# Altium PCB PCB_PDB_V2.PcbDoc (part 1 of 2)
Units mm, origin at the board's own origin, x right, y up, seen from the top; angles counter-clockwise.
Board outline 70 x 60 mm, 4 copper layers (Top Layer, Int1, Int2, Bottom Layer), stack 1.649 mm thick; 78 components, 35 nets, 226 pads, 126 vias.
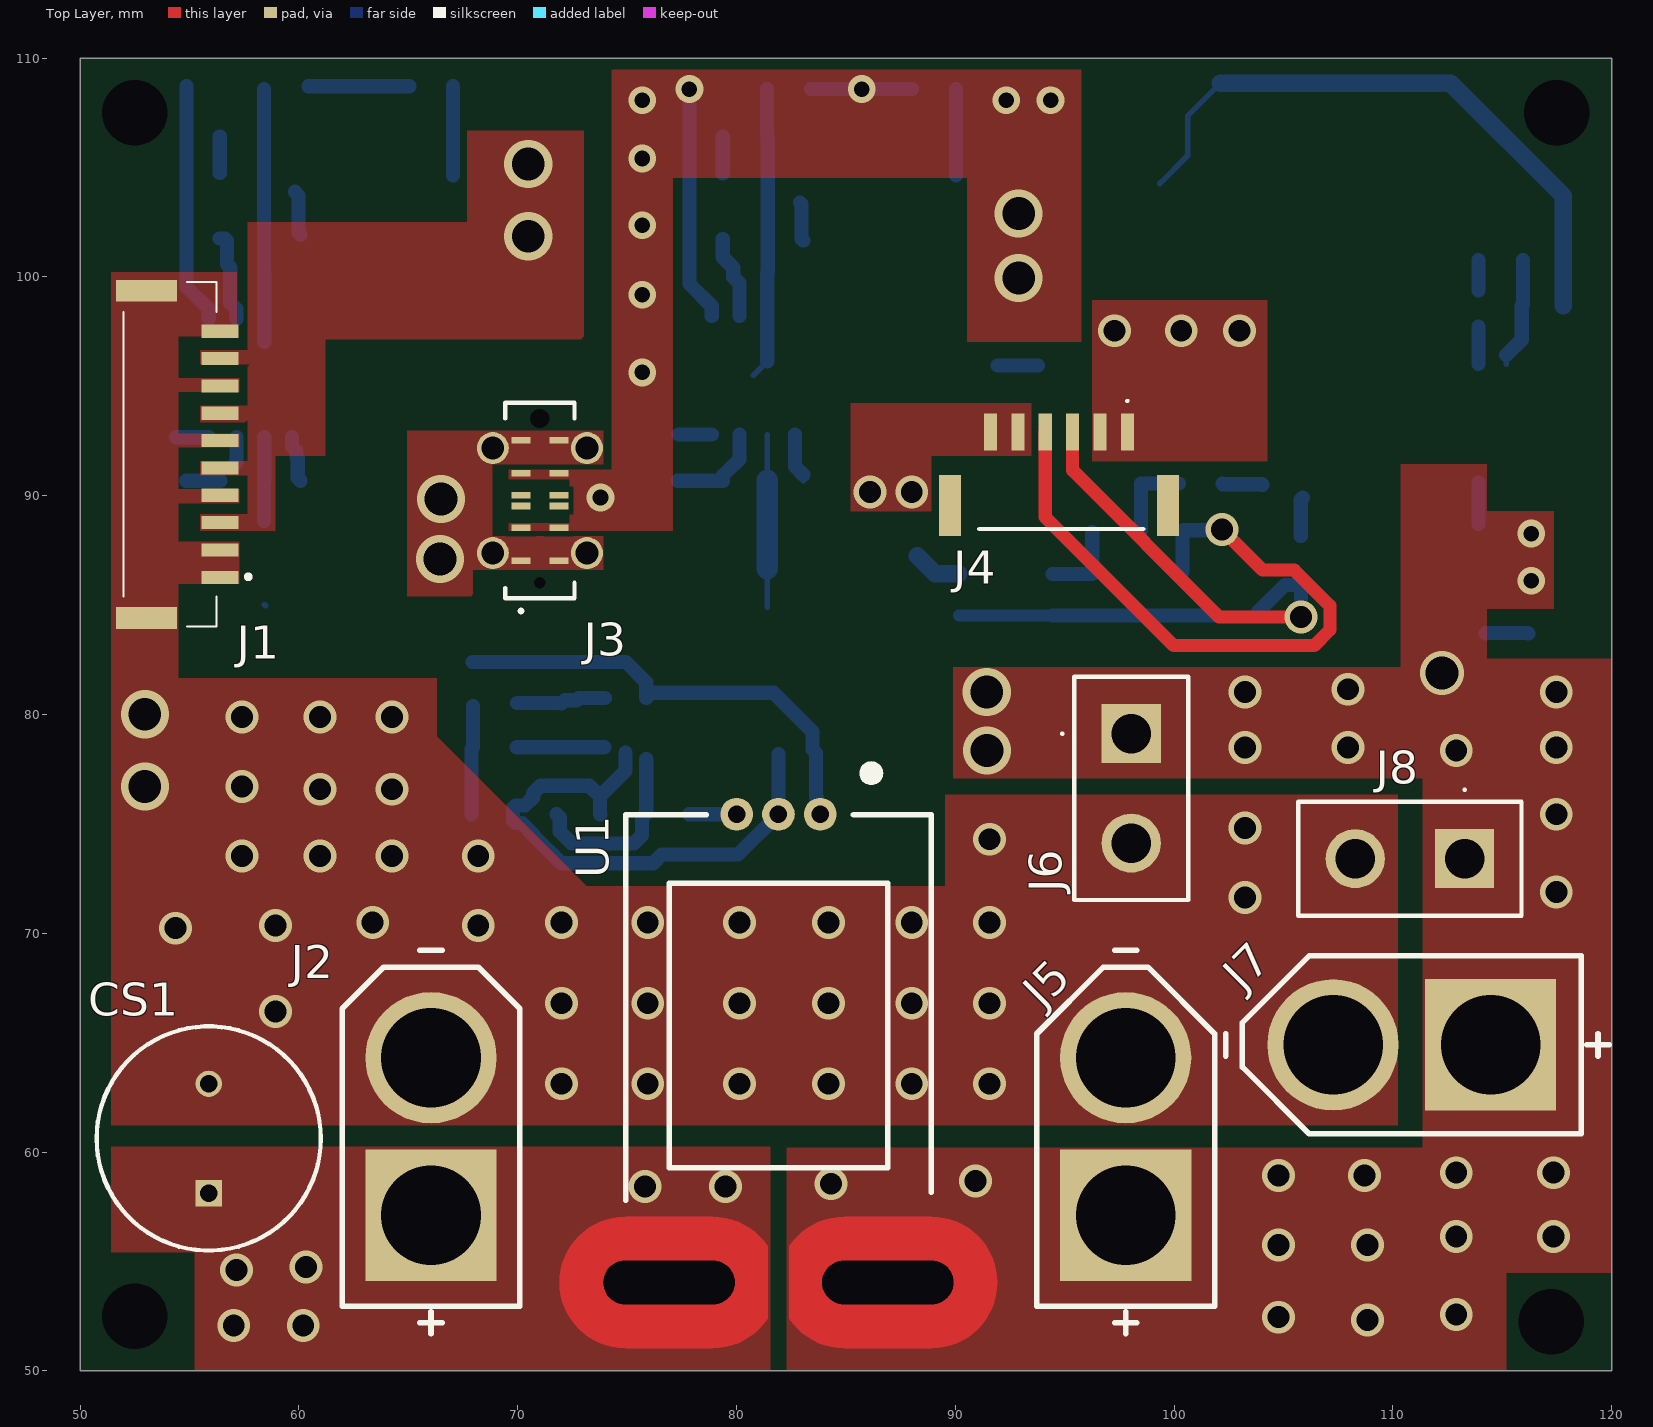
[diagram p0: Top Layer view]
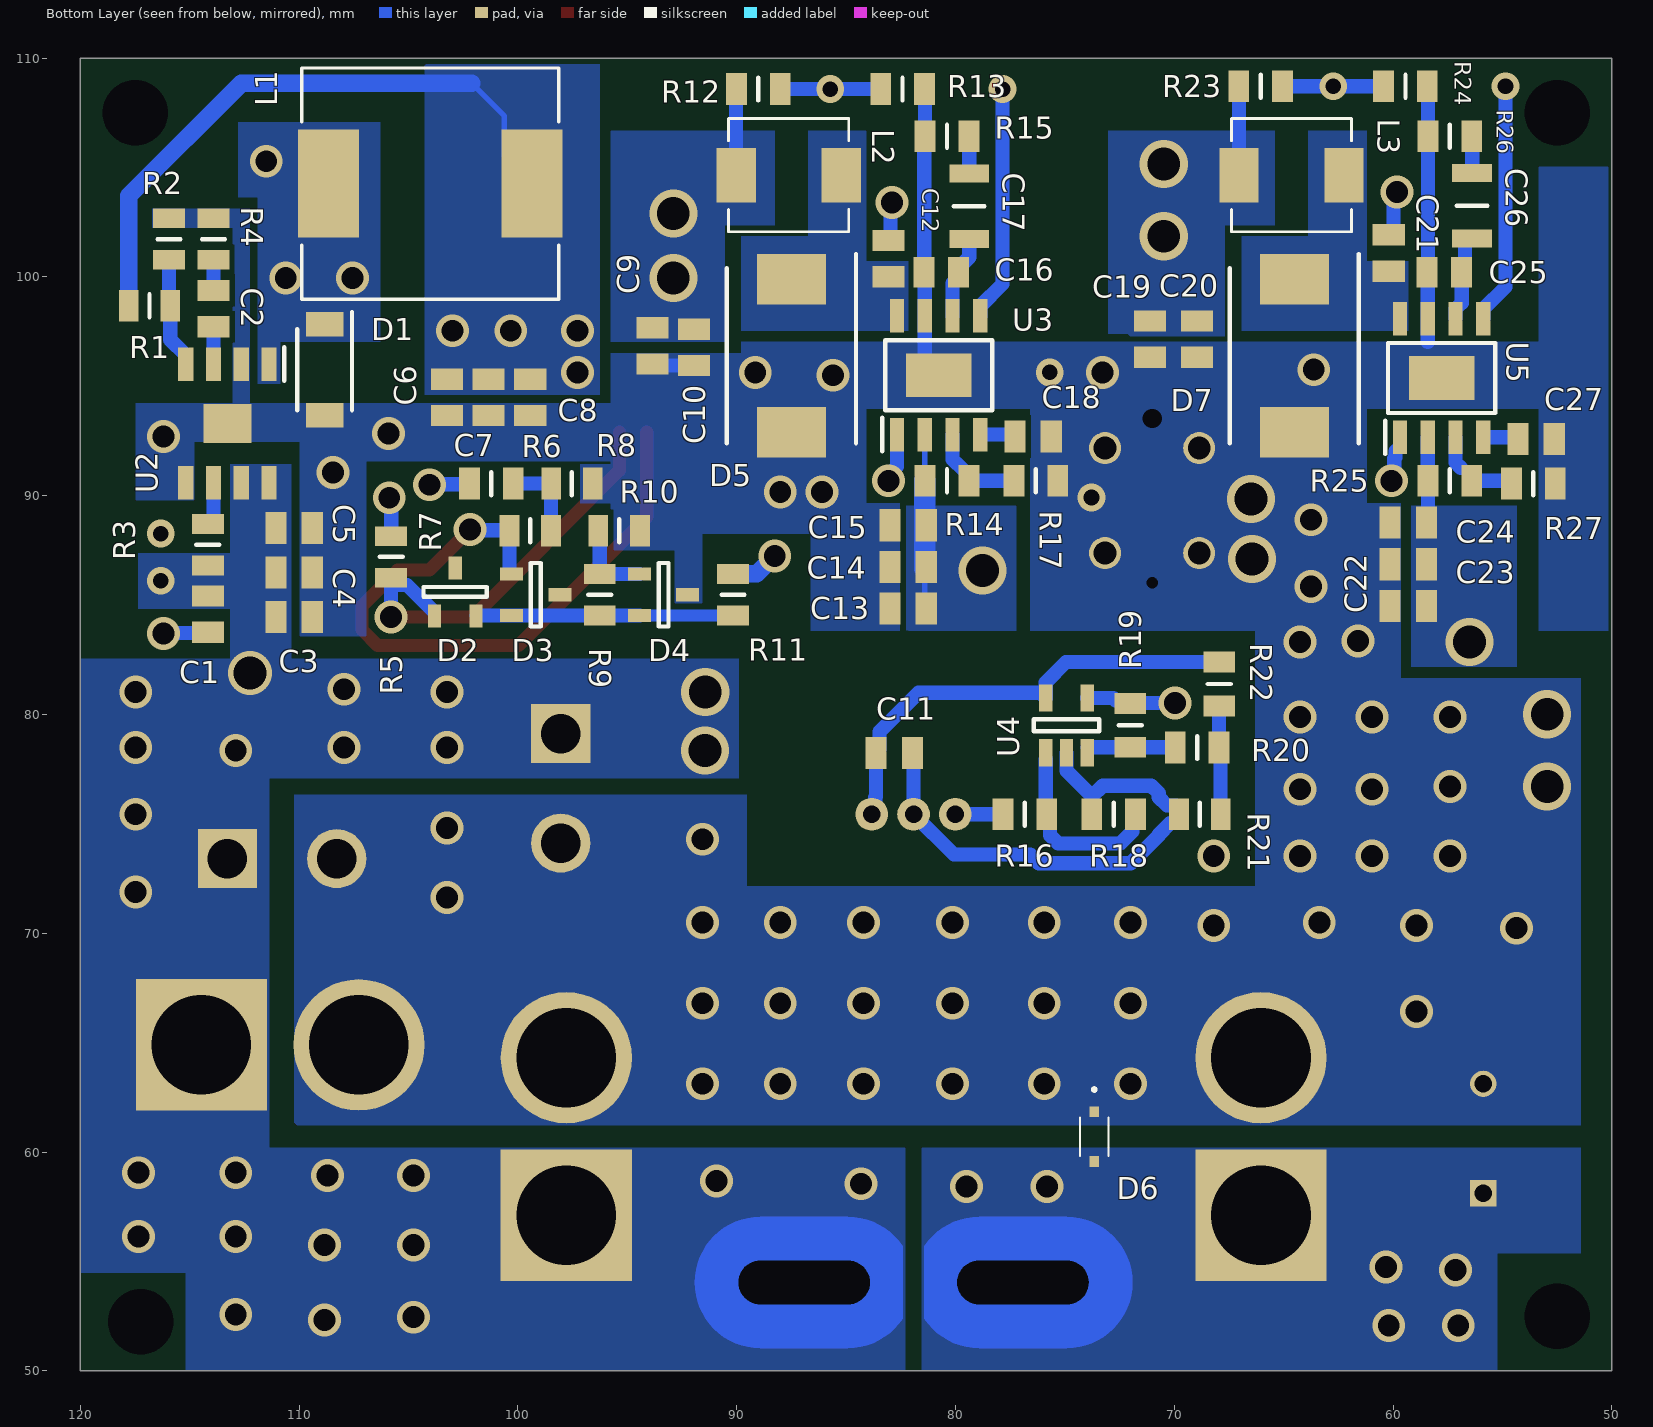
[diagram p1: Bottom Layer view, seen from below]
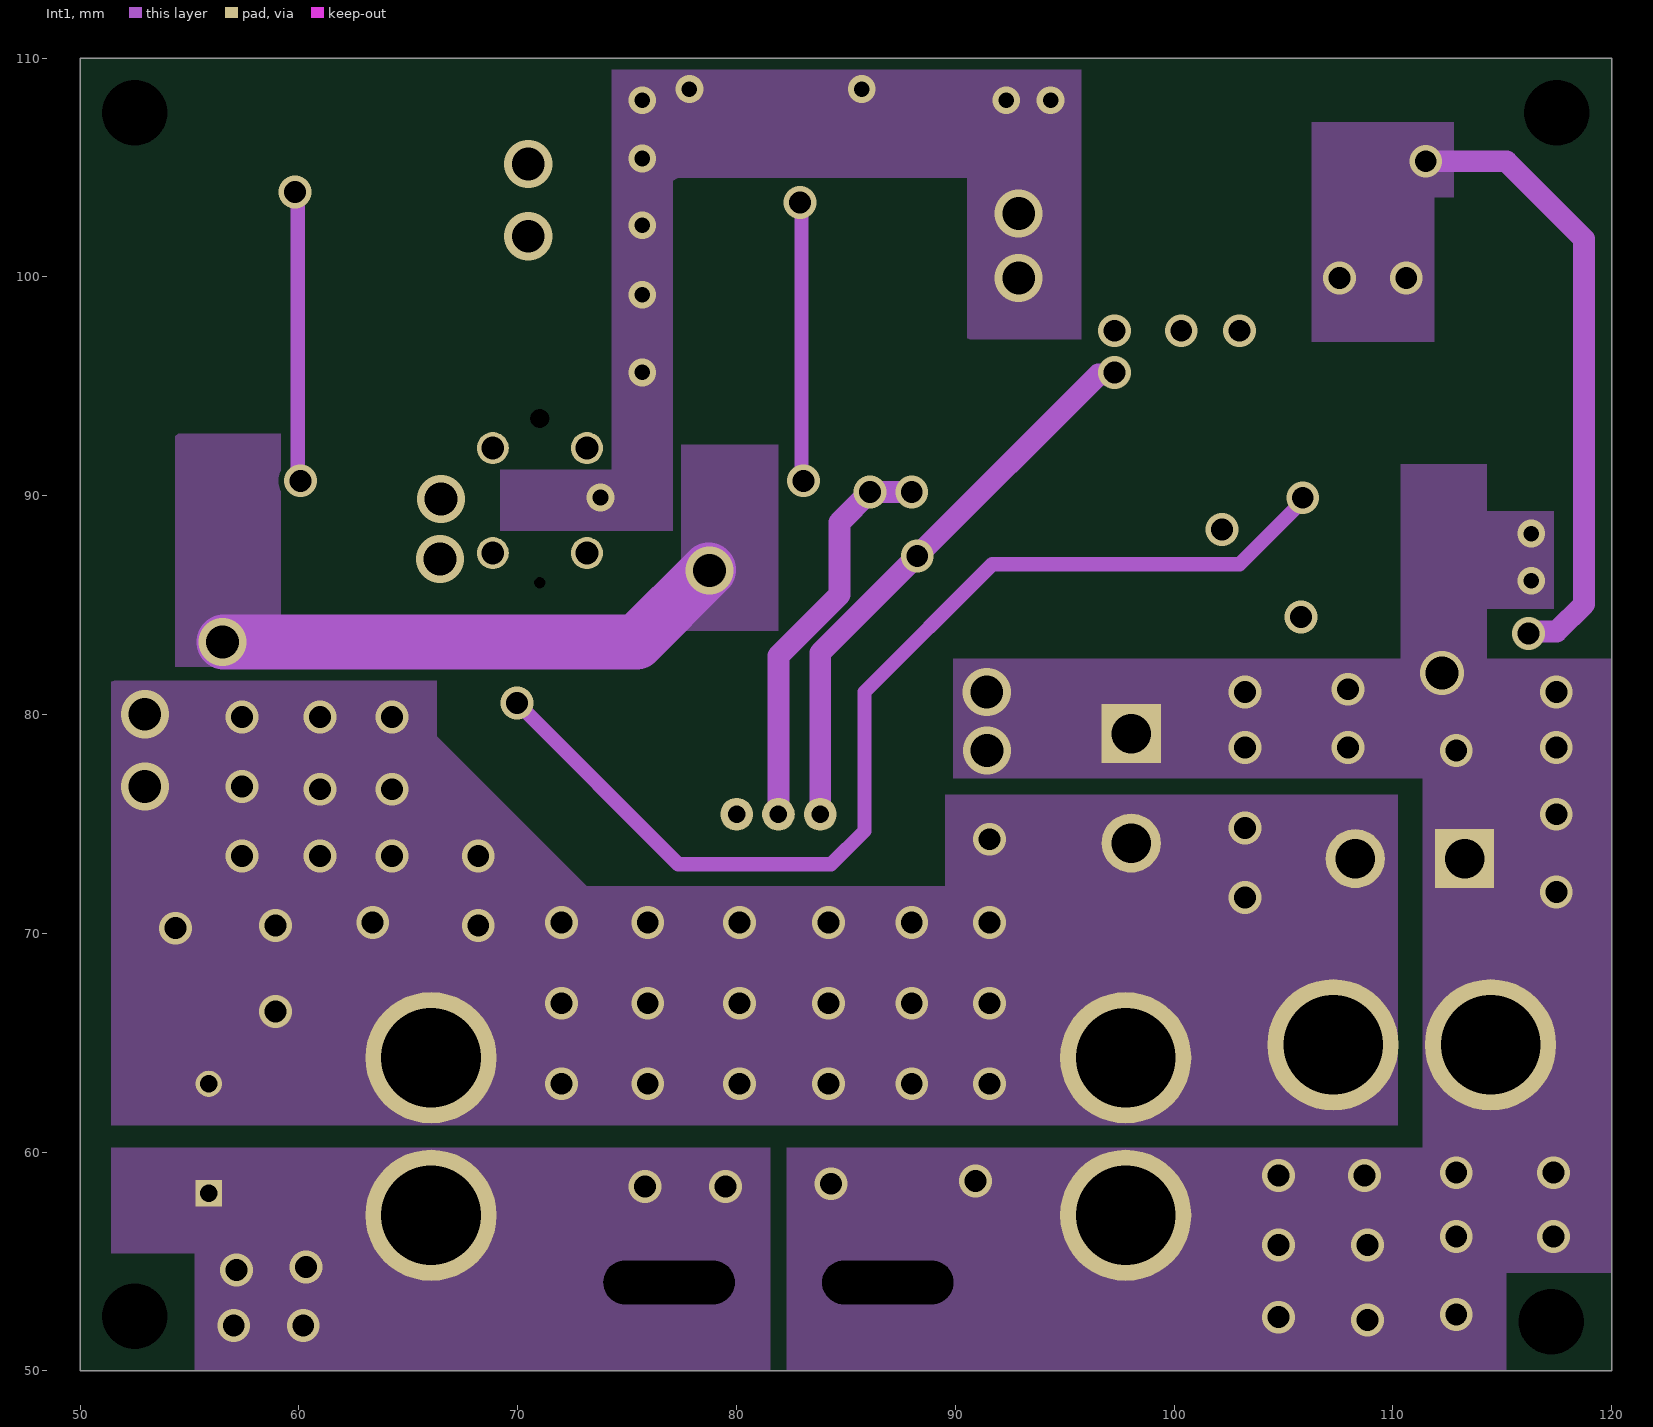
[diagram p2: Int1]
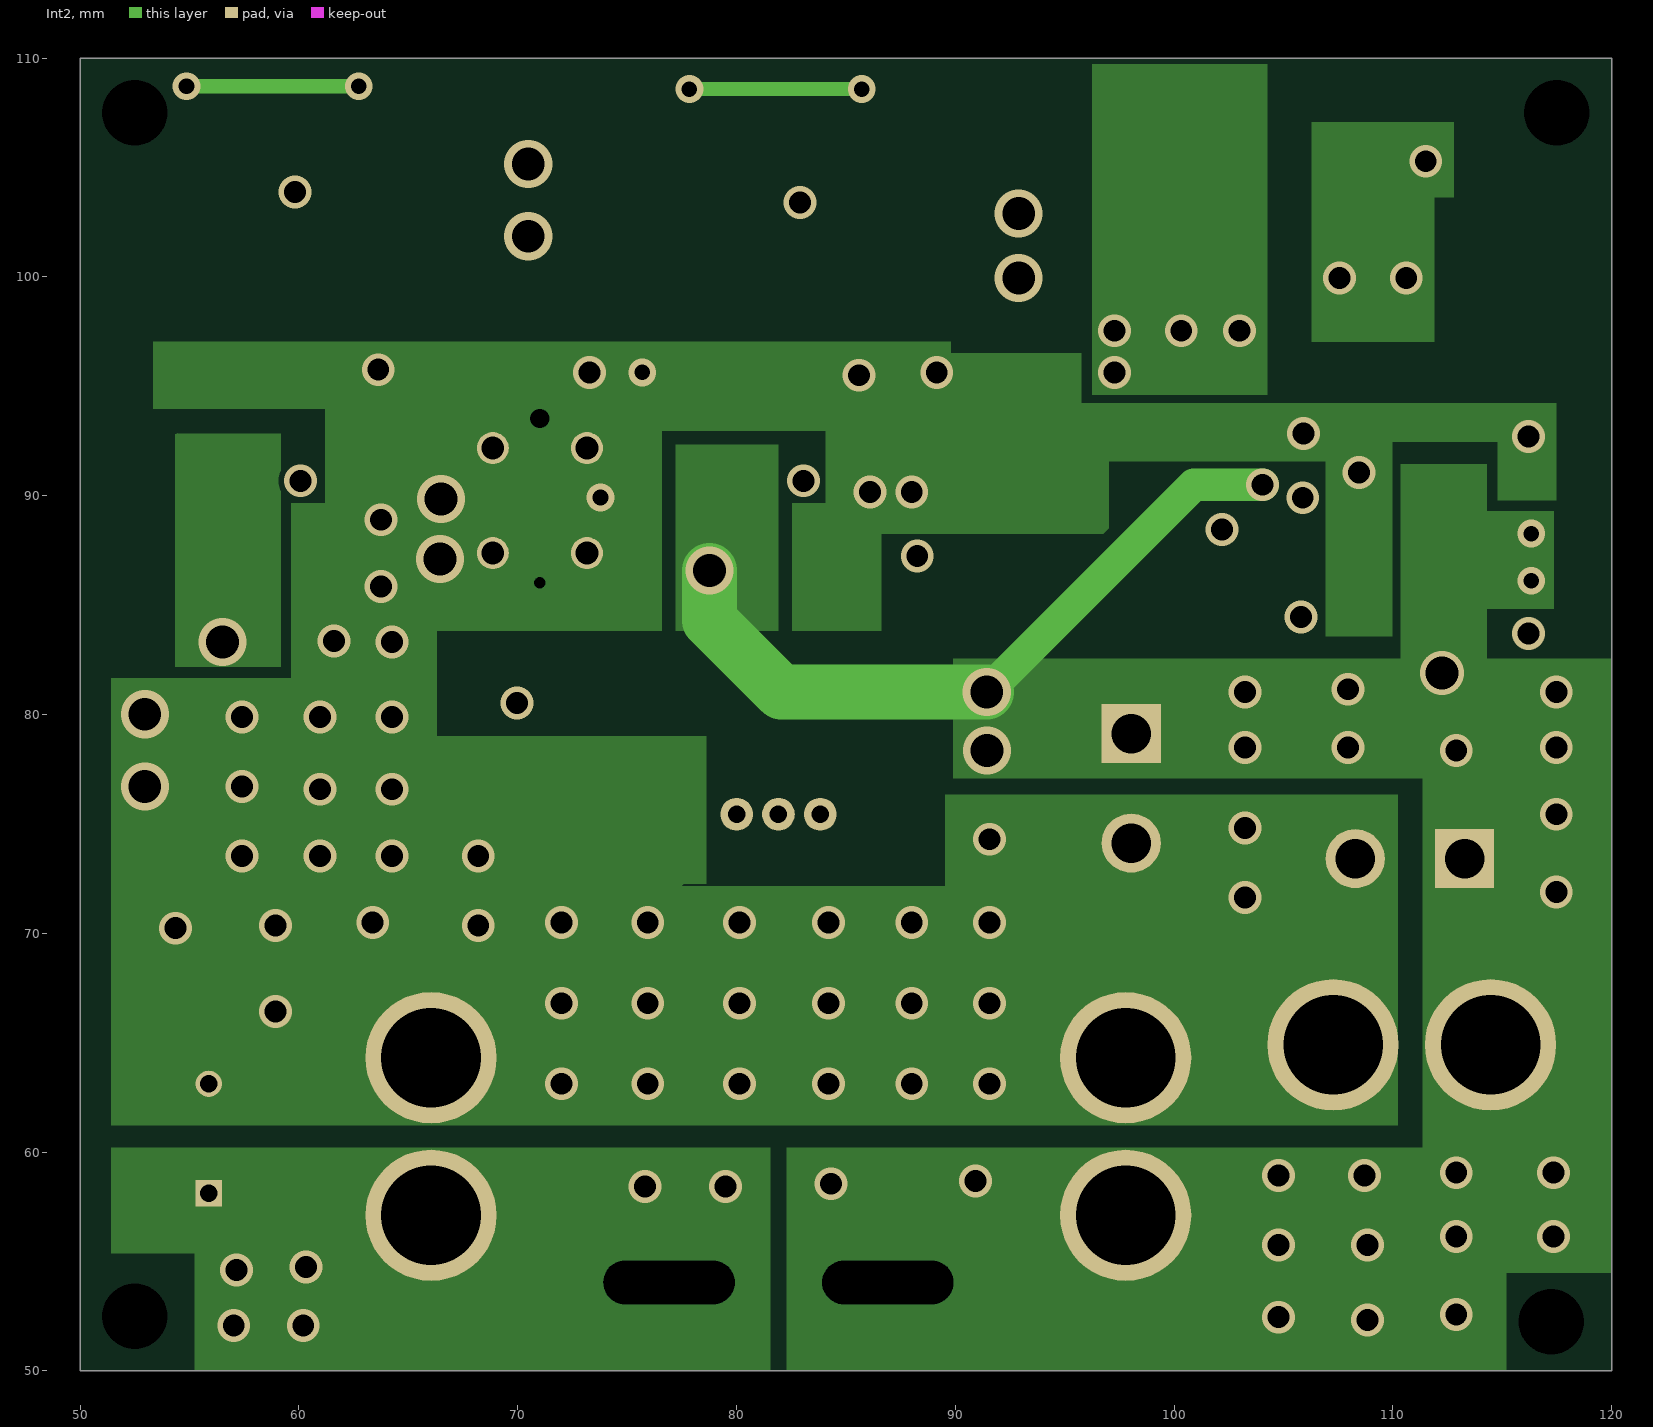
[diagram p3: Int2]
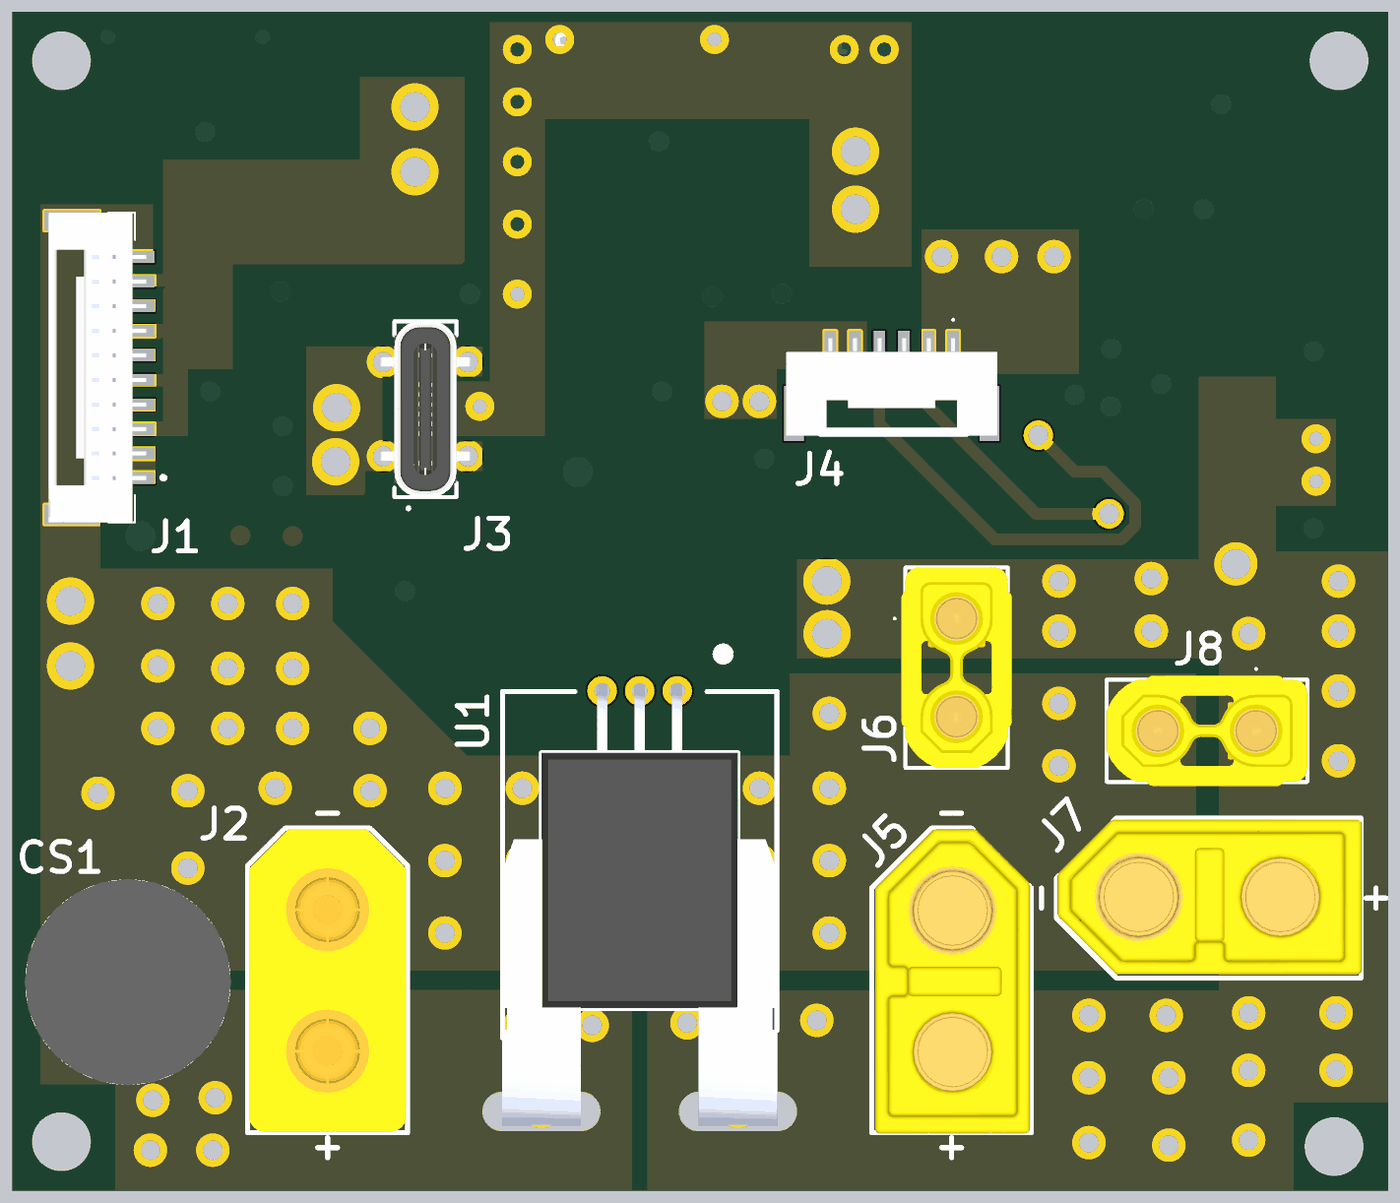
[diagram p4: 3D render of the assembled board from above, using the file's embedded part models]
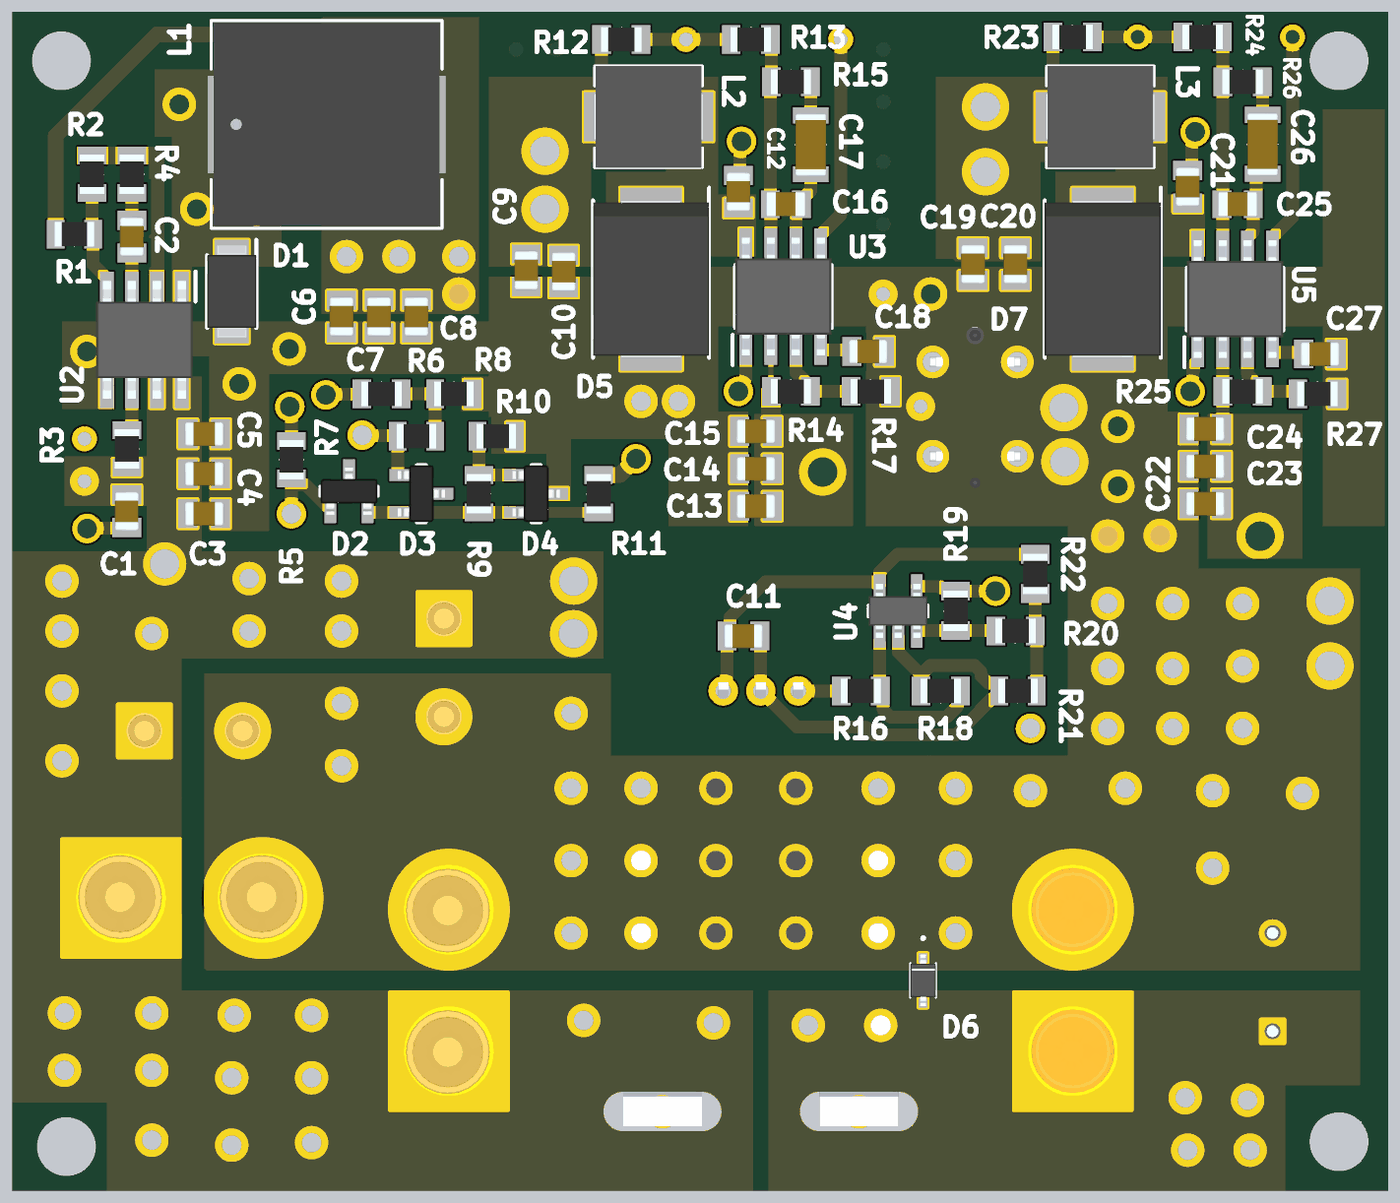
[diagram p5: 3D render of the assembled board from below, using the file's embedded part models]

## Layer stack, top to bottom
Top Solder: solder mask 0.0254, SM-001, Dk 4
Top Layer: signal copper 0.105
Dielectric 1: prepreg 0.1295, PP-017, Dk 4.3
Dielectric 2: prepreg 0.1295, PP-017, Dk 4.3
Int1: signal copper 0.105
Dielectric 3: core 0.7112, Core-039, Dk 4.8
Int2: signal copper 0.105
Dielectric 4: prepreg 0.1295, PP-017, Dk 4.3
Dielectric 5: prepreg 0.1295, PP-017, Dk 4.3
Bottom Layer: signal copper 0.105
Bottom Solder: solder mask 0.0254, SM-001, Dk 4

## Board outline
50,50 50,110 120,110 120,50

## Design rules (kind name [scope] priority, off if disabled: settings)
Clearance [All] p1: gap=0.254 ignorepadtopadclearanceinfootprint=FALSE
MinimumSolderMaskSliver [All] p1: minsoldermaskwidth=0.2
PolygonConnect [All] p1: connectstyle=Direct reliefconductorwidth=0.65 reliefentries=4 polygonreliefangle="90 Angle" airgapwidth=0.254
RoutingVias [All] p1: holewidth=0.711 width=1.27 viastyle="Through Hole" minholewidth=0.711 minwidth=1.27 maxholewidth=0.711 maxwidth=1.27
SilkToSilkClearance [All] p1: silktosilkclearance=0.2
SilkToSolderMaskClearance [IsPad] p1: minsilkscreentomaskgap=0.2 clearancetoexposedcopper=TRUE
SolderMaskExpansion [All] p1: expansion=0.102 istentingtop=FALSE
SupplyNets "Schematic Supply Nets_4" [InNet('+22.2V BATTERY')] p1: voltage=0.000
SupplyNets "Schematic Supply Nets_3" [InNet('GND')] p2: voltage=0.000
SupplyNets "Schematic Supply Nets_2" [InNet('PIXHAWK_VOLTAGE_READ')] p3: voltage=0.000
SupplyNets "Schematic Supply Nets_1" [InNet('PIXHAWK_CURRENT_READ')] p4: voltage=0.000
SupplyNets "Schematic Supply Nets" [InNet('+5V PIXHAWK')] p5: voltage=0.000
Width [All] p1 off: maxlimit=0.254 minlimit=0.254 preferedwidth=0.254
27 further rules are at their usual default settings.

## Components (designator, comment, footprint, x,y, rotation, side; value= is the part's Value field where it differs from the comment)
C1 "0.1uF" CAPC2012X145N 114.173,84.582 r90 bottom
C2 "10nF" CAPC2012X145N 113.919,98.552 r270 bottom (schematic designator C8)
C3 "10uF 35V" CAPC2012X145N 110.236,84.455 r0 bottom (schematic designator C5)
C4 "10uF 35V" CAPC2012X145N 110.236,86.487 r0 bottom (schematic designator C6)
C5 "0.1uF" CAPC2012X145N 110.236,88.519 r0 bottom (schematic designator C7)
C6 "47uF 10V" CAPC2012X145N 103.251,94.488 r90 bottom (schematic designator C4)
C7 "47uF 10V" CAPC2012X145N 101.346,94.488 r90 bottom (schematic designator C3)
C8 "47uF 10V" CAPC2012X145N 99.441,94.488 r90 bottom (schematic designator C2)
C9 "47uF 10V" CAPC2012X145N 93.853,96.842 r90 bottom (schematic designator C14)
C10 "47uF 10V" CAPC2012X145N 91.948,96.774 r90 bottom (schematic designator C13)
C11 "0.1uF" CAPC2012X145N 82.804,78.232 r0 bottom (schematic designator C27)
C12 "0.1uF" CAPC2012X145N 83.058,100.838 r270 bottom
C13 "4.7 uF 50V" CAPC2012X145N 82.169,84.836 r180 bottom (schematic designator C20)
C14 "4.7 uF 50V" CAPC2012X145N 82.169,86.741 r180 bottom (schematic designator C21)
C15 "10nF" CAPC2012X145N 82.169,88.646 r180 bottom (schematic designator C22)
C16 "22 pF 50 V" CAPC2012X70N 80.645,100.203 r180 bottom (schematic designator C24)
C17 "2200pF" CAPC3216X130N 79.375,103.227 r270 bottom (schematic designator C23)
C18 "10nF" CAPC2012X145N 76.454,92.71 r0 bottom (schematic designator C26)
C19 "47uF 10V" CAPC2012X145N 71.12,97.155 r90 bottom (schematic designator C11)
C20 "47uF 10V" CAPC2012X145N 68.961,97.155 r90 bottom (schematic designator C10)
C21 "0.1uF" CAPC2012X145N 60.198,101.092 r270 bottom (schematic designator C9)
C22 "4.7 uF 50V" CAPC2012X145N 59.309,84.963 r180 bottom (schematic designator C15)
C23 "4.7 uF 50V" CAPC2012X145N 59.309,86.868 r180 bottom (schematic designator C16)
C24 "10nF" CAPC2012X145N 59.309,88.773 r180 bottom (schematic designator C17)
C25 "22 pF 50 V" CAPC2012X70N 57.658,100.203 r180 bottom (schematic designator C19)
C26 "2200pF" CAPC3216X130N 56.388,103.251 r270 bottom (schematic designator C18)
C27 "10nF" CAPC2012X145N 53.467,92.583 r0 bottom (schematic designator C25)
CS1 "1000uF" CAPPRD500W60D1025H2150 55.88,58.119 r90 top
D1 "60V" SODFL4725X105N 108.839,95.758 r270 bottom
D2 "BAT54S,215" SOT95P230X110-3N 102.87,85.598 r90 bottom (schematic designator D6)
D3 "BAT54S,215" SOT95P230X110-3N 99.187,85.471 r180 bottom (schematic designator D7)
D4 "TL431MFDT,215" SOT95P230X110-3N 93.345,85.471 r180 bottom (schematic designator D8)
D5 "CDBC540-G" DIOM8059X290N 87.503,96.393 r270 bottom (schematic designator D3)
D6 "SD15C-01FTG" SD15C01FTG 73.66,60.706 r270 bottom (schematic designator D5)
D7 "CDBC540-G" DIOM8059X290N 64.516,96.393 r270 bottom (schematic designator D2)
J1 "BM10B-GHS-TBT_LF__SN__N_" BM10BGHSTBTLFSNN 56.388,91.891 r270 top
J2 "XT60PB-M" XT60PB-M 66.04,60.706 r0 top (schematic designator J3)
J3 "USB4120-03-C" USB412003C 71.017,89.777 r90 top (schematic designator J2)
J4 "BM06B-GHS-TBT_LF__SN_" BM06BGHSTBTLFSN 94.742,90.678 r0 top
J5 "XT60PB-F" XT60PB-F 97.79,60.706 r0 top
J6 "XT30UPB-F" XT30UPBF 98.044,79.121 r180 top (schematic designator J7)
J7 "XT60PB-F" XT60PB-F 110.871,64.897 r90 top (schematic designator J6)
J8 "XT30UPB-F" XT30UPBF 113.284,73.406 r90 top
L1 "22 uH" IND_104CDMCCDS_SUM 104.013,104.267 r180 bottom
L2 "4.7uH" IND_ECS-MPIL0530-4R7MC 87.63,104.648 r0 bottom (schematic designator L3)
L3 "4.7uH" IND_ECS-MPIL0530-4R7MC 64.643,104.648 r0 bottom (schematic designator L2)
R1 "160k" RESC2012X60N 116.84,98.679 r0 bottom (schematic designator R2)
R2 "30k" RESC2012X60N 115.951,101.727 r270 bottom (schematic designator R4)
R3 "10k" RESC2012X60N 114.173,87.757 r270 bottom (schematic designator R1)
R4 "4.7k" RESC2012X60N 113.919,101.727 r270 bottom (schematic designator R3)
R5 "100" RESC2012X60N 105.8,87.2 r270 bottom (schematic designator R25)
R6 "20k" RESC2012X50N 101.219,90.551 r180 bottom (schematic designator R24)
R7 "100" RESC2012X60N 99.441,88.392 r0 bottom (schematic designator R27)
R8 "1.6K" RESC2012X60N 97.536,90.551 r0 bottom (schematic designator R26)
R9 "806" RESC2012X60N 96.266,85.471 r270 bottom (schematic designator R21)
R10 "2.49k" RESC2012X60N 95.377,88.392 r0 bottom (schematic designator R23)
R11 "750" RESC2012X60N 90.17,85.471 r90 bottom (schematic designator R22)
R12 "10.2k" RESC2012X50N 89.011,108.585 r0 bottom (schematic designator R8)
R13 "1.96k" RESC2012X50N 82.423,108.585 r0 bottom (schematic designator R14)
R14 "665k" RESC2012X50N 80.391,90.678 r0 bottom (schematic designator R6)
R15 "37.4k" RESC2012X50N 80.391,106.426 r180 bottom (schematic designator R11)
R16 "20k" RESC2012X50N 76.835,75.438 r0 bottom (schematic designator R15)
R17 "130k" RESC2012X50N 76.327,90.678 r0 bottom (schematic designator R12)
R18 "20k" RESC2012X50N 72.771,75.438 r180 bottom (schematic designator R16)
R19 "20k" RESC2012X50N 72.009,79.502 r270 bottom (schematic designator R18)
R20 "20k" RESC2012X50N 68.961,78.486 r0 bottom (schematic designator R17)
R21 "2k" RESC2012X60N 68.834,75.438 r180 bottom (schematic designator R19)
R22 "18k" RESC2012X50N 67.945,81.391 r90 bottom (schematic designator R20)
R23 "10.2k" RESC2012X50N 66.056,108.712 r0 bottom (schematic designator R7)
R24 "1.96k" RESC2012X50N 59.436,108.712 r0 bottom (schematic designator R13)
R25 "665k" RESC2012X50N 57.404,90.678 r0 bottom (schematic designator R5)
R26 "37.4k" RESC2012X50N 57.404,106.426 r180 bottom (schematic designator R9)
R27 "130k" RESC2012X50N 53.594,90.551 r0 bottom (schematic designator R10)
U1 "Current sensor" "ACS770xCB-PFF - Sans Via-in-Pad" 81.92,65.788 r180 top locked (schematic designator U4)
U2 "BD9G401EFJ-ME2" SOIC127P600X100-9N 113.284,93.3 r270 bottom (schematic designator U1)
U3 "TPS54531DDAR" SOIC127P600X175-8N 80.772,95.504 r90 bottom
U4 "LM321SN3T1G" SOT95P275X110-5N 74.93,79.502 r90 bottom (schematic designator U5)
U5 "TPS54531DDAR" SOIC127P600X175-8N 57.785,95.377 r90 bottom (schematic designator U2)

## Footprints (in the part's own frame and the unit in brackets; to place one, negate y for a bottom-side part, rotate by r counter-clockwise, add the part's x,y. Pads: shape width x height; smd on the part's side, far side on the other; paste and mask are expansions set on the pad)
"ACS770xCB-PFF - Sans Via-in-Pad" [mm] "Current sensor"
  round 1.5 hole 0.8: 1(-1.91,-9.65) 2(0,-9.65) 3(1.91,-9.65)
  round 1.524 hole 2 slot 6 at 0 deg: 4(5,11.75) 5(-5,11.75)
  round 0.025 smd: 4(5.25,11.75) 5(-5.25,11.75)
  round 0.025 smd far side: 4(5.25,11.75) 5(-5.25,11.75)
  Top Layer region: 7,14.75 3,14.75 1.581,14.393 0.5,13.408 0.5,13.408 0.5,10.092 1.581,9.107 3,8.75 3,8.75 7,8.75 8.302,9.047 9.345,9.88 9.925,11.082 9.925,12.418 9.345,13.62 8.302,14.453 7,14.75
  Top Layer region: -7,8.75 -3,8.75 -1.581,9.107 -0.5,10.092 -0.5,10.092 -0.5,13.408 -1.581,14.393 -3,14.75 -3,14.75 -7,14.75 -8.302,14.453 -9.345,13.62 -9.925,12.418 -9.925,11.082 -9.345,9.88 -8.302,9.047 -7,8.75
  Bottom Layer region: 7,14.75 3,14.75 1.581,14.393 0.5,13.408 0.5,13.408 0.5,10.092 1.581,9.107 3,8.75 3,8.75 7,8.75 8.302,9.047 9.345,9.88 9.925,11.082 9.925,12.418 9.345,13.62 8.302,14.453 7,14.75
  Bottom Layer region: -7,8.75 -3,8.75 -1.581,9.107 -0.5,10.092 -0.5,10.092 -0.5,13.408 -1.581,14.393 -3,14.75 -3,14.75 -7,14.75 -8.302,14.453 -9.345,13.62 -9.925,12.418 -9.925,11.082 -9.345,9.88 -8.302,9.047 -7,8.75
  silkscreen extent -6.99,-12.07 6.99,8, body extent -7,-10.1 7,12.5, height 8
BM06BGHSTBTLFSN [mm]
  rect 0.6x1.7 smd: 1(3.125,2.225) 2(1.875,2.225) 3(0.625,2.225) 4(-0.625,2.225) 5(-1.875,2.225) 6(-3.125,2.225)
  rect 1x2.8 smd: MP1(4.975,-1.125) MP2(-4.975,-1.125)
  silkscreen extent -3.65,-2.2 3.85,3.7, body extent -5.37,-2.24 5.38,2.71, height 4.21
BM10BGHSTBTLFSNN [mm]
  rect 0.6x1.7 smd: 1(5.625,0) 2(4.375,0) 3(3.125,0) 4(1.875,0) 5(0.625,0) 6(-0.625,0) 7(-1.875,0) 8(-3.125,0) 9(-4.375,0) 10(-5.625,0)
  rect 1x2.8 smd: MP1(-7.475,-3.35) MP2(7.475,-3.35)
  silkscreen extent -7.88,-4.4 7.88,1.4, body extent -7.88,-4.54 7.88,0.41, height 4.05
CAPC2012X70N [mm]
  rect 0.96x1.39 smd: 1(-0.79,0) 2(0.79,0)
  body extent -1,-0.63 1,0.63, height 0.7
CAPC2012X145N [mm]
  rect 0.97x1.47 smd: 1(-0.83,0) 2(0.83,0)
  body extent -1,-0.63 1,0.63, height 1.45
CAPC3216X130N [mm]
  rect 0.82x1.82 smd: 1(-1.5,0) 2(1.5,0)
  silkscreen extent 0,-0.7 0,0.7, body extent -1.6,-0.8 1.6,0.8, height 1.3
CAPPRD500W60D1025H2150 [mm]
  rect 1.2x1.2 hole 0.8: 1(0,0)
  round 1.2 hole 0.8: 2(5,0)
  silkscreen extent -2.62,-5.13 7.62,5.13, body extent -2.75,-5.24 7.75,5.24, height 21.5
DIOM8059X290N [mm]
  rect 2.3x3.15 smd: 1(-3.5,0) 2(3.5,0)
  silkscreen extent -4.65,-2.95 4,2.95, body extent -4,-2.95 4,2.95, height 2.9
IND_104CDMCCDS_SUM [mm]
  rect 2.789x4.954 smd paste+0 mask+0: 1(-4.658,0) 2(4.658,0)
  silkscreen extent -5.88,-5.28 5.88,5.28, body extent -5.75,-5.16 5.75,5.16, height 3.99
IND_ECS-MPIL0530-4R7MC [mm]
  rect 1.8x2.5 smd: 1(-2.4,0) 2(2.4,0)
  silkscreen extent -2.75,-2.59 2.75,2.59, body extent -2.75,-2.59 2.75,2.59, height 3
RESC2012X50N [mm]
  rect 0.95x1.45 smd: 1(-1,0) 2(1,0)
  silkscreen extent 0,-0.53 0,0.53, body extent -1.02,-0.63 1.02,0.63, height 0.5
RESC2012X60N [mm]
  rect 0.9x1.45 smd: 1(-0.95,0) 2(0.95,0)
  silkscreen extent 0,-0.53 0,0.53, body extent -1,-0.63 1,0.63, height 0.6
SD15C01FTG [mm]
  rect 0.49x0.45 smd: 1(-1.14,0) 2(1.14,0)
  silkscreen extent -2.2,-0.65 0.87,0.65, body extent -1.31,-0.65 1.31,0.65, height 1
SODFL4725X105N [mm]
  rect 1.12x1.72 smd: 1(-2.075,0) 2(2.075,0)
  silkscreen extent -2.64,-1.25 1.85,1.25, body extent -2.35,-1.25 2.35,1.25, height 0.95
SOIC127P600X100-9N [mm]
  rect 1.525x0.7 smd: 1(-2.712,1.905) 2(-2.712,0.635) 3(-2.712,-0.635) 4(-2.712,-1.905) 5(2.712,-1.905) 6(2.712,-0.635) 7(2.712,0.635) 8(2.712,1.905)
  rect 1.8x2.2 smd: 9(0,0)
  silkscreen extent -3.47,2.61 -1.95,2.61, body extent -3,-2.45 3,2.45, height 1
SOIC127P600X175-8N [mm]
  rect 1.525x0.65 smd: 1(-2.712,1.905) 2(-2.712,0.635) 3(-2.712,-0.635) 4(-2.712,-1.905) 5(2.712,-1.905) 6(2.712,-0.635) 7(2.712,0.635) 8(2.712,1.905)
  rect 2x3 smd: 9(0,0)
  silkscreen extent -3.47,-2.45 1.6,2.58, body extent -3,-2.45 3,2.45, height 1.75
SOT95P230X110-3N [mm]
  rect 1.05x0.6 smd: 1(-1.1,0.95) 2(-1.1,-0.95) 3(1.1,0)
  silkscreen extent -0.23,-1.45 0.23,1.45, body extent -1.2,-1.45 1.2,1.45, height 0.95
SOT95P275X110-5N [mm]
  rect 1.25x0.6 smd: 1(-1.25,0.95) 2(-1.25,0) 3(-1.25,-0.95) 4(1.25,-0.95) 5(1.25,0.95)
  silkscreen extent -0.28,-1.5 0.28,1.5, body extent -1.38,-1.5 1.38,1.5, height 1.1
USB412003C [mm]
  rect 0.3x0.87 smd: A1(-2.75,0.865) A4(-1.25,0.865) A6(-0.25,0.865) A7(0.25,0.865) A9(1.25,0.865) A12(2.75,0.865) B1(2.75,-0.865) B4(1.25,-0.865) B6(0.25,-0.865) B7(-0.25,-0.865) B9(-1.25,-0.865) B12(-2.75,-0.865)
  round 1.46 hole 1.04: MH1(-2.4,2.15) MH2(2.4,2.15) MH3(2.4,-2.15) MH4(-2.4,-2.15)
  round 0.26 hole 0.52 unplated: MH5(-3.75,0)
  round 0.445 hole 0.89 unplated: MH6(3.75,0)
  silkscreen extent -5.1,-1.58 4.47,1.58, body extent -4.47,-2.3 4.47,2.3, height 6.5
XT30UPBF [mm]
  rect 2.7x2.7 hole 1.8: 1(0,0)
  round 2.7 hole 1.8: 2(0,5)
  silkscreen extent -2.6,-2.6 3.2,7.6, body extent -2.81,-2.6 2.81,7.6, height 9.41
XT60PB-F [mm] "Connector"
  round 6 hole 4.55: N(0,3.6)
  rect 6x6 / inner round 6 / far side rect 6x6 hole 4.55: P(0,-3.6)
  silkscreen extent -4.06,-9.02 4.06,8.51, body extent -3.9,-7.8 4,7.7, height 16.69
XT60PB-M [mm] "Connector"
  round 6 hole 4.55: N(0,3.6)
  rect 6x6 / inner round 6 / far side rect 6x6 hole 4.55: P(0,-3.6)
  silkscreen extent -4.06,-9.02 4.06,8.51, body extent -4,-7.7 4,7.7, height 15.9

## Part data
C1 C5 C11 C12 C21: library part C2012X7R2A104K125AA, "Capacitor", Manufacturer_Name=TDK, Mouser Part Number=810-C2012X7R2A104K, Arrow Part Number=C2012X7R2A104K125AA, Arrow Price/Stock=https://www.arrow.com/en/products/c2012x7r2a104k125aa/tdk?region=europe, ClassName=PowerModul, Datasheet Link=https://product.tdk.com/info/en/catalog/datasheets/mlcc_commercial_midvoltage_en.pdf, Height=1.45mm, Manufacturer_Part_Number=C2012X7R2A104K125AA, Mouser Price/Stock=https://www.mouser.co.uk/ProductDetail/TDK/C2012X7R2A104K125AA?qs=NRhsANhppD9J0ZsT2%2Fo%2F7Q%3D%3D
C2 C15 C18 C24 C27: library part C2012X7R2E103K125AA, "Capacitor", Manufacturer_Name=TDK, Mouser Part Number=810-C2012X7R2E103K, Arrow Part Number=C2012X7R2E103K125AA, Arrow Price/Stock=https://www.arrow.com/en/products/c2012x7r2e103k125aa/tdk?region=nac, ClassName=PowerModul, Datasheet Link=https://product.tdk.com/info/en/catalog/datasheets/mlcc_commercial_midvoltage_en.pdf, Height=1.45mm, Manufacturer_Part_Number=C2012X7R2E103K125AA, Mouser Price/Stock=https://www.mouser.co.uk/ProductDetail/TDK/C2012X7R2E103K125AA?qs=NRhsANhppD%2FvPjIeAxskbg%3D%3D
C3 C4: library part C2012X5R1V106K125AC, "Capacitor", Manufacturer_Name=TDK, Mouser Part Number=810-C2012X5R1V106K1C, Arrow Part Number=C2012X5R1V106K125AC, Arrow Price/Stock=https://www.arrow.com/en/products/c2012x5r1v106k125ac/tdk?region=europe, ClassName=PowerModul, Datasheet Link=https://product.tdk.com/info/en/catalog/datasheets/mlcc_commercial_midvoltage_en.pdf, Height=1.45mm, Manufacturer_Part_Number=C2012X5R1V106K125AC, Mouser Price/Stock=https://www.mouser.co.uk/ProductDetail/TDK/C2012X5R1V106K125AC?qs=6JAMGB%252BEdkwcwonKbQLeCg%3D%3D
C6 C7 C8 C9 C10 C19 C20: library part C2012X5R1A476M125AC, "Capacitor", Manufacturer_Name=TDK, Mouser Part Number=810-C2012X5R1A476M, Arrow Part Number=C2012X5R1A476M125AC, Arrow Price/Stock=https://www.arrow.com/en/products/c2012x5r1a476m125ac/tdk?region=nac, ClassName=PowerModul, Datasheet Link=https://product.tdk.com/info/en/catalog/datasheets/mlcc_commercial_midvoltage_en.pdf, Height=1.45mm, Manufacturer_Part_Number=C2012X5R1A476M125AC, Mouser Price/Stock=https://www.mouser.co.uk/ProductDetail/TDK/C2012X5R1A476M125AC?qs=LcTL%2F5vFEzGyFw5hxP%2FMXw%3D%3D
C13 C14 C22 C23: library part GRM21BR61H475KE51L, "Capacitor", Manufacturer_Name="Murata Electronics", Mouser Part Number=81-GRM21BR61H475KE1L, Arrow Part Number=GRM21BR61H475KE51L, Arrow Price/Stock=https://www.arrow.com/en/products/grm21br61h475ke51l/murata-manufacturing?region=nac, Datasheet Link=https://search.murata.co.jp/Ceramy/image/img/A01X/G101/ENG/GRM21BR61H475KE51-01A.pdf, Height=1.45mm, Manufacturer_Part_Number=GRM21BR61H475KE51L, Mouser Price/Stock=https://www.mouser.co.uk/ProductDetail/Murata-Electronics/GRM21BR61H475KE51L?qs=eeBpzGFlv%252B%252BOtLzDC1PY6Q%3D%3D
C16 C25: library part CC0805JRNPO9BN220, "Capacitor", Manufacturer_Name=YAGEO, Mouser Part Number=603-CC805JRNPO9BN220, Datasheet Link=https://componentsearchengine.com/Datasheets/2/CC0805JRNPO9BN220.pdf, Height=0.7mm, Manufacturer_Part_Number=CC0805JRNPO9BN220, Mouser Price/Stock=https://www.mouser.co.uk/ProductDetail/YAGEO/CC0805JRNPO9BN220?qs=vTakOoo5QyK71b5vkghGmg%3D%3D
C17 C26: library part CGA5H4C0G2J222J115AA, "Capacitor 2200pF 630V", Manufacturer_Name=TDK, Datasheet Link=http://docs-europe.electrocomponents.com/webdocs/14e9/0900766b814e9125.pdf, Height=1.3mm, Manufacturer_Part_Number=CGA5H4C0G2J222J115AA
CS1: library part 35PX1000MEFC10X20, "Capacitor Polarised", Manufacturer_Name=Rubycon, Mouser Part Number=232-35PX1000MEFC10X2, Arrow Part Number=35PX1000MEFC10X20, Arrow Price/Stock=https://www.arrow.com/en/products/35px1000mefc10x20/rubycon?region=nac, Datasheet Link=https://www.rubycon.co.jp/wp-content/uploads/catalog-aluminum/PX.pdf, Height=21.5mm, Manufacturer_Part_Number=35PX1000MEFC10X20, Mouser Price/Stock=https://www.mouser.co.uk/ProductDetail/Rubycon/35PX1000MEFC10X20?qs=T3oQrply3y86%2F1qnNfO%252BAA%3D%3D
D1: library part RBR5LAM60ATFTR, "Schottky Diode", Manufacturer_Name="ROHM Semiconductor", Mouser Part Number=755-RBR5LAM60ATFTR, ClassName=PowerModul, Datasheet Link=https://fscdn.rohm.com/en/products/databook/datasheet/discrete/diode/schottky_barrier/rbr5lam60atftr-e.pdf, Height=1.05mm, Manufacturer_Part_Number=RBR5LAM60ATFTR, Mouser Price/Stock=https://www.mouser.co.uk/ProductDetail/ROHM-Semiconductor/RBR5LAM60ATFTR?qs=4v%252BiZTmLVHGKJkO8tMW4zA%3D%3D
D2 D3: "Schottky Diode", Manufacturer_Name=Nexperia, Mouser Part Number=771-BAT54S-T/R, Arrow Part Number=BAT54S,215, Arrow Price/Stock=https://www.arrow.com/en/products/bat54s215/nexperia?utm_currency=USD&region=europe, Datasheet Link=https://assets.nexperia.com/documents/data-sheet/BAT54S.pdf, Height=1.1mm, Manufacturer_Part_Number=BAT54S,215, Mouser Price/Stock=https://www.mouser.co.uk/ProductDetail/Nexperia/BAT54S215?qs=me8TqzrmIYVOaf3j7zH0Wg%3D%3D
D4: "Integrated Circuit", Manufacturer_Name=Nexperia, Mouser Part Number=771-TL431MFDT215, Arrow Part Number=TL431MFDT,215, Arrow Price/Stock=https://www.arrow.com/en/products/tl431mfdt215/nexperia?utm_currency=USD&region=nac, Datasheet Link=https://assets.nexperia.com/documents/data-sheet/TL431_FAM.pdf, Height=1.1mm, Manufacturer_Part_Number=TL431MFDT,215, Mouser Price/Stock=https://www.mouser.co.uk/ProductDetail/Nexperia/TL431MFDT215?qs=A1cBxND5mHKvFzVl3lBdcQ%3D%3D
D5 D7: "Diode", Manufacturer_Name="Comchip Technology", Mouser Part Number=750-CDBC540-G, Arrow Part Number=CDBC540-G, Arrow Price/Stock=https://www.arrow.com/en/products/cdbc540-g/comchip-technology?utm_currency=USD&region=nac, Datasheet Link=https://eu.mouser.com/datasheet/2/80/CDBC520-HF_Thru195340._CDBC5100-HF_RevB-1480991.pdf, Height=2.9mm, Manufacturer_Part_Number=CDBC540-G, Mouser Price/Stock=https://www.mouser.co.uk/ProductDetail/Comchip-Technology/CDBC540-G?qs=tw%252BuQ%2FB6PO2ExpPYY64Vzw%3D%3D
D6: "TVS Diode (Bi-directional)", Manufacturer_Name=LITTELFUSE, Mouser Part Number=576-SD15C-01FTG, Arrow Part Number=SD15C-01FTG, Arrow Price/Stock=https://www.arrow.com/en/products/sd15c-01ftg/littelfuse?region=nac, Datasheet Link=https://www.arrow.com/en/products/sd15c-01ftg/littelfuse, Height=1.14mm, Manufacturer_Part_Number=SD15C-01FTG, Mouser Price/Stock=https://www.mouser.co.uk/ProductDetail/Littelfuse/SD15C-01FTG?qs=4zl93aaztU8pjSvpxpJP6g%3D%3D
J1: "Connector", Arrow Part Number=BM10B-GHS-TBT(LF)(SN)(N), Manufacturer_Name="JST (JAPAN SOLDERLESS TERMINALS)", Arrow Price/Stock=https://www.arrow.com/en/products/bm10b-ghs-tbt-lf-sn-n/jst-manufacturing?utm_currency=USD&region=europe, Datasheet Link=http://www.jst-mfg.com/product/pdf/eng/eGH.pdf, Height=4.05mm, Manufacturer_Part_Number=BM10B-GHS-TBT(LF)(SN)(N)
J2 J5 J7: "Connector", ComponentLink1Description=Datasheet
  J2: ComponentLink1URL=https://www.tme.com/Document/ceb306d6300f4d2860483975b79af125/XT60UPB-M.pdf
  J5 J7: ComponentLink1URL=https://www.tme.com/Document/aa7a0328674fda4109d00dc748bb5162/XT60UPB-F.pdf
J3: "Connector", Manufacturer_Name="GCT (GLOBAL CONNECTOR TECHNOLOGY)", Mouser Part Number=640-USB4120-03-C, Datasheet Link=https://gct.co/connector/usb4120, Height=6.75mm, Manufacturer_Part_Number=USB4120-03-C, Mouser Price/Stock=https://www.mouser.co.uk/ProductDetail/GCT/USB4120-03-C?qs=KUoIvG%2F9IlZaAd13sVDhkQ%3D%3D
J4: "Connector", Manufacturer_Name="JST (JAPAN SOLDERLESS TERMINALS)", Manufacturer_Part_Number=BM06B-GHS-TBT(LF)(SN), Mouser Part Number=306-BM06BGHSTBTLFSNN, Datasheet Link=https://datasheet.lcsc.com/szlcsc/2004111131_JST-Sales-America-BM06B-GHS-TBT-LF-SN_C495534.pdf, Height=4.05mm, Mouser Price/Stock=https://www.mouser.co.uk/ProductDetail/JST-Commercial/BM06B-GHS-TBTLFSN?qs=cdbOS8ANM9CObKjnhD04mw%3D%3D
J6 J8: "Connector", Manufacturer_Name=Amass, Datasheet Link=https://www.tme.eu/Document/81f11ca924696756331f21b972812074/XT30PB-F.pdf, Height=9.4mm, Manufacturer_Part_Number=XT30UPB-F
L1: library part 104CDMCCDS-220MC, "Bobine de 22 uH, 5 A", Manufacturer_Name=Sumida, ComponentLink1Description=Datasheet, ComponentLink1URL=https://products.sumida.com/products/pdf/104CDMCCDS.pdf, Copyright="Copyright (C) 2025 Ultra Librarian. All rights reserved.", Manufacturer_Part_Number=104CDMCCDS-220MC, Type="Fixed Inductors"
L2 L3: library part ECS-MPIL0530-4R7MC, "4.7 µH Shielded Molded Inductor 5 A 60mOhm Max Nonstandard -", Package="ECS-MPIL0530-0-2 ECS", Check_prices=https://www.snapeda.com/parts/ECS-MPIL0530-4R7MC/ECS/view-part/?ref=eda, MF="ECS Inc.", MP=ECS-MPIL0530-4R7MC, SnapEDA_Link=https://www.snapeda.com/parts/ECS-MPIL0530-4R7MC/ECS/view-part/?ref=snap
R1: library part CRCW0805160KFKEAHP, "Resistor", Manufacturer_Name=Vishay, ClassName=PowerModul, Datasheet Link=https://componentsearchengine.com/Datasheets/1/CRCW08051R00FKEAHP.pdf, Height=0.6mm, Manufacturer_Part_Number=CRCW0805160KFKEAHP
R2: library part CRCW080530K0FKEAC, "Resistor", Manufacturer_Name=Vishay, Mouser Part Number=71-CRCW080530K0FKEAC, Arrow Part Number=CRCW080530K0FKEAC, Arrow Price/Stock=https://www.arrow.com/en/products/crcw080530k0fkeac/vishay?region=nac, ClassName=PowerModul, Datasheet Link=https://mouser.componentsearchengine.com/Datasheets/1/CRCW080530K0FKEAC.pdf, Height=0.6mm, Manufacturer_Part_Number=CRCW080530K0FKEAC, Mouser Price/Stock=https://www.mouser.co.uk/ProductDetail/Vishay-Dale/CRCW080530K0FKEAC?qs=E3Y5ESvWgWMYq9MgiyaMow%3D%3D
R3: library part CRCW080510K0FKEAHP, "Resistor", Manufacturer_Name=Vishay, Mouser Part Number=71-CRCW080510K0FKEAH, Arrow Part Number=CRCW080510K0FKEAHP, Arrow Price/Stock=https://www.arrow.com/en/products/crcw080510k0fkeahp/vishay?utm_currency=USD&region=europe, ClassName=PowerModul, Datasheet Link=https://componentsearchengine.com/Datasheets/1/CRCW08051R00FKEAHP.pdf, Height=0.6mm, Manufacturer_Part_Number=CRCW080510K0FKEAHP, Mouser Price/Stock=https://www.mouser.co.uk/ProductDetail/Vishay-Dale/CRCW080510K0FKEAHP?qs=FlFvgi4rxBybVOW6oiRQjA%3D%3D
R4: library part CRCW08054K70FKEAC, "Resistor", Manufacturer_Name=Vishay, Mouser Part Number=71-CRCW08054K70FKEAC, Arrow Part Number=CRCW08054K70FKEAC, Arrow Price/Stock=https://www.arrow.com/en/products/crcw08054k70fkeac/vishay?region=nac, ClassName=PowerModul, Datasheet Link=https://mouser.componentsearchengine.com/Datasheets/1/CRCW08054K70FKEAC.pdf, Height=0.6mm, Manufacturer_Part_Number=CRCW08054K70FKEAC, Mouser Price/Stock=https://www.mouser.co.uk/ProductDetail/Vishay-Dale/CRCW08054K70FKEAC?qs=E3Y5ESvWgWOQAAVugewEHA%3D%3D
R5 R7: library part CRCW0805100RFKEA, "Resistor", Manufacturer_Name=Vishay, Mouser Part Number=71-CRCW0805-100-E3, Arrow Part Number=CRCW0805100RFKEA, Arrow Price/Stock=https://www.arrow.com/en/products/crcw0805100rfkea/vishay?utm_currency=USD&region=nac, Datasheet Link=http://www.vishay.com/docs/20035/dcrcwe3.pdf, Height=0.5mm, Manufacturer_Part_Number=CRCW0805100RFKEA, Mouser Price/Stock=https://www.mouser.co.uk/ProductDetail/Vishay-Dale/CRCW0805100RFKEA?qs=LOX6nxTstiYDPDKmuLyNLw%3D%3D
R6 R16 R18 R19 R20: library part CRCW080520K0FKEA, "Resistor", Manufacturer_Name=Vishay, Mouser Part Number=71-CRCW0805-20K-E3, Arrow Part Number=CRCW080520K0FKEA, Arrow Price/Stock=https://www.arrow.com/en/products/crcw080520k0fkea/vishay, Datasheet Link=http://www.vishay.com/docs/20035/dcrcwe3.pdf, Height=0.5mm, Manufacturer_Part_Number=CRCW080520K0FKEA, Mouser Price/Stock=https://www.mouser.co.uk/ProductDetail/Vishay-Dale/CRCW080520K0FKEA?qs=t6Mf8e9K%2Ful9pWSqXxFD1w%3D%3D
R8: library part CRCW08051K60FKEAC, "Resistor", Manufacturer_Name=Vishay, Mouser Part Number=71-CRCW08051K60FKEAC, Arrow Part Number=CRCW08051K60FKEAC, Arrow Price/Stock=https://www.arrow.com/en/products/crcw08051k60fkeac/vishay, Datasheet Link=https://www.arrow.com/en/products/crcw08051k60fkeac/vishay, Height=0.6mm, Manufacturer_Part_Number=CRCW08051K60FKEAC, Mouser Price/Stock=https://www.mouser.co.uk/ProductDetail/Vishay-Dale/CRCW08051K60FKEAC?qs=E3Y5ESvWgWMJaZYHQus8LQ%3D%3D
R9: library part CRCW0805806RFKEAHP, "Resistor", Manufacturer_Name=Vishay, Datasheet Link=https://componentsearchengine.com/Datasheets/1/CRCW08051R00FKEAHP.pdf, Height=0.6mm, Manufacturer_Part_Number=CRCW0805806RFKEAHP
R10: library part CRCW08052K49FKEAC, "Resistor", Manufacturer_Name=Vishay, Mouser Part Number=71-CRCW08052K49FKEAC, Arrow Part Number=CRCW08052K49FKEAC, Arrow Price/Stock=https://www.arrow.com/en/products/crcw08052k49fkeac/vishay, Datasheet Link=https://componentsearchengine.com/Datasheets/1/CRCW08052K49FKEAC.pdf, Height=0.5mm, Manufacturer_Part_Number=CRCW08052K49FKEAC, Mouser Price/Stock=https://www.mouser.com/Search/Refine.aspx?Keyword=71-CRCW08052K49FKEAC
R11: library part CRCW0805750RFKEAHP, "Resistor", Manufacturer_Name=Vishay, Mouser Part Number=71-CRCW0805750RFKEAH, Arrow Part Number=CRCW0805750RFKEAHP, Arrow Price/Stock=https://www.arrow.com/en/products/crcw0805750rfkeahp/vishay?region=nac, Datasheet Link=https://componentsearchengine.com/Datasheets/1/CRCW08051R00FKEAHP.pdf, Height=0.6mm, Manufacturer_Part_Number=CRCW0805750RFKEAHP, Mouser Price/Stock=https://www.mouser.co.uk/ProductDetail/Vishay-Dale/CRCW0805750RFKEAHP?qs=40TFAHZMFvdp5ouInDDfaw%3D%3D
R12 R23: library part CRCW080510K2FKEA, "Resistor", Manufacturer_Name=Vishay, Mouser Part Number=71-CRCW0805-10.2K-E3, Arrow Part Number=CRCW080510K2FKEA, Arrow Price/Stock=https://www.arrow.com/en/products/crcw080510k2fkea/vishay?region=nac, Datasheet Link=http://www.vishay.com/docs/20035/dcrcwe3.pdf, Height=0.5mm, Manufacturer_Part_Number=CRCW080510K2FKEA, Mouser Price/Stock=https://www.mouser.co.uk/ProductDetail/Vishay-Dale/CRCW080510K2FKEA?qs=LOX6nxTstibTXRK16X5NEQ%3D%3D
R13 R24: library part CRCW08051K96FKEA, "Resistor", Manufacturer_Name=Vishay, Mouser Part Number=71-CRCW08051K96FKEA, Arrow Part Number=CRCW08051K96FKEA, Arrow Price/Stock=https://www.arrow.com/en/products/crcw08051k96fkea/vishay?region=nac, Datasheet Link=http://www.vishay.com/docs/20035/dcrcwe3.pdf, Height=0.5mm, Manufacturer_Part_Number=CRCW08051K96FKEA, Mouser Price/Stock=https://www.mouser.co.uk/ProductDetail/Vishay-Dale/CRCW08051K96FKEA?qs=1CkV0QOCgMpA%2F6GTgXIN%2Fg%3D%3D
R14 R25: library part CRCW0805665KFKEA, "Resistor", Manufacturer_Name=Vishay, Datasheet Link=http://www.vishay.com/docs/20035/dcrcwe3.pdf, Height=0.5mm, Manufacturer_Part_Number=CRCW0805665KFKEA
R15 R26: library part CRCW080537K4FKEA, "Resistor", Manufacturer_Name=Vishay, Mouser Part Number=71-CRCW0805-37.4K-E3, Datasheet Link=http://www.vishay.com/docs/20035/dcrcwe3.pdf, Height=0.5mm, Manufacturer_Part_Number=CRCW080537K4FKEA, Mouser Price/Stock=https://www.mouser.co.uk/ProductDetail/Vishay-Dale/CRCW080537K4FKEA?qs=ofC1ORbyWJfwcxfoRR0MKw%3D%3D
R17 R27: library part CRCW0805130KFKEA, "Resistor", Manufacturer_Name=Vishay, Mouser Part Number=71-CRCW0805-130K-E3, Arrow Part Number=CRCW0805130KFKEA, Arrow Price/Stock=https://www.arrow.com/en/products/crcw0805130kfkea/vishay, Datasheet Link=http://www.vishay.com/docs/20035/dcrcwe3.pdf, Height=0.5mm, Manufacturer_Part_Number=CRCW0805130KFKEA, Mouser Price/Stock=https://www.mouser.co.uk/ProductDetail/Vishay-Dale/CRCW0805130KFKEA?qs=0y7Riw94L4iHKWUxGOctIA%3D%3D
R21: library part CRCW08052K00FKEAC, "Resistor", Manufacturer_Name=Vishay, Mouser Part Number=71-CRCW08052K00FKEAC, Arrow Part Number=CRCW08052K00FKEAC, Arrow Price/Stock=https://www.arrow.com/en/products/crcw08052k00fkeac/vishay?utm_currency=USD&region=nac, Datasheet Link=http://www.vishay.com/docs/28773/crcwce3.pdf, Height=0.6mm, Manufacturer_Part_Number=CRCW08052K00FKEAC, Mouser Price/Stock=https://www.mouser.co.uk/ProductDetail/Vishay-Dale/CRCW08052K00FKEAC?qs=E3Y5ESvWgWP6floxGsbShA%3D%3D
R22: library part CRCW080518K0FKEAC, "Resistor", Manufacturer_Name=Vishay, Mouser Part Number=71-CRCW080518K0FKEAC, Arrow Part Number=CRCW080518K0FKEAC, Arrow Price/Stock=https://www.arrow.com/en/products/crcw080518k0fkeac/vishay?region=nac, Datasheet Link=https://www.arrow.com/en/products/crcw080518k0fkeac/vishay?region=nac, Height=0.5mm, Manufacturer_Part_Number=CRCW080518K0FKEAC, Mouser Price/Stock=https://www.mouser.co.uk/ProductDetail/Vishay-Dale/CRCW080518K0FKEAC?qs=E3Y5ESvWgWPSwNx6fNHotQ%3D%3D
U1: library part ACS770KCB-150U-PFF-T, "150 A , Unidirectional", ComponentLink1Description=Datasheet, ComponentLink1URL=https://www.allegromicro.com/~/media/Files/Datasheets/ACS770-Datasheet.ashx
U2: "Buck converter", Manufacturer_Name="ROHM Semiconductor", Mouser Part Number=755-BD9G401EFJ-ME2, ClassName=PowerModul, Datasheet Link=https://componentsearchengine.com/Datasheets/1/BD9G401EFJ-ME2.pdf, Height=1mm, Manufacturer_Part_Number=BD9G401EFJ-ME2, Mouser Price/Stock=https://www.mouser.co.uk/ProductDetail/ROHM-Semiconductor/BD9G401EFJ-ME2?qs=HXFqYaX1Q2yXryPBxafgDg%3D%3D
U3 U5: "Power Supply", Manufacturer_Name="Texas Instruments", Mouser Part Number=595-TPS54531DDAR, Arrow Part Number=TPS54531DDAR, Arrow Price/Stock=https://www.arrow.com/en/products/tps54531ddar/texas-instruments?utm_currency=USD&region=nac, Datasheet Link=http://www.ti.com/lit/gpn/tps54531, Height=1.7mm, Manufacturer_Part_Number=TPS54531DDAR, Mouser Price/Stock=https://www.mouser.co.uk/ProductDetail/Texas-Instruments/TPS54531DDAR?qs=jA5Ki6243onykODzUePbag%3D%3D
U4: "Integrated Circuit", Manufacturer_Name=onsemi, Mouser Part Number=863-LM321SN3T1G, Arrow Part Number=LM321SN3T1G, Arrow Price/Stock=https://www.arrow.com/en/products/lm321sn3t1g/on-semiconductor?utm_currency=USD&region=nac, Datasheet Link=https://www.onsemi.com/pub/Collateral/LM321-D.PDF, Height=1.1mm, Manufacturer_Part_Number=LM321SN3T1G, Mouser Price/Stock=https://www.mouser.co.uk/ProductDetail/onsemi/LM321SN3T1G?qs=slMPpRTKD5qNVsCzBsHVZA%3D%3D

## Free pads (board coordinates)
  round 1 hole 3 unplated: MH3(52.5,52.5) MH3(52.5,107.5) MH3(117.25,52.25) MH3(117.5,107.5)

## Via types
v1: diameter 1.5, hole 1, Top Layer to Bottom Layer, 71 vias
v2: diameter 1.5, hole 1, Int1 to Bottom Layer, 12 vias
v3: diameter 1.5, hole 1, Int2 to Bottom Layer, 12 vias
v4: diameter 2.2, hole 1.5, Top Layer to Bottom Layer, 10 vias
v5: diameter 1.27, hole 0.711, Top Layer to Int1, 10 vias
v6: diameter 1.27, hole 0.711, Int2 to Bottom Layer, 6 vias
v7: diameter 1.27, hole 0.711, Top Layer to Bottom Layer, 2 vias
v8: diameter 2.2, hole 1.5, Int1 to Bottom Layer, 2 vias
v9: diameter 2, hole 1.5, Top Layer to Bottom Layer, 1 vias

## Nets (pads, with @x,y where several pads share a name; then routed paths per layer and width w, separated by ;. In a path a pad name is that pad's centre, name@x,y a point inside that pad or via, vN(x,y) a via of type N, cw(c..) or ccw(c..) an arc to the next point about the centre after c; other vN are vias at no path point)
"+5V PIXHAWK": C6.2 C7.2 C8.2 C11.2 J4.1 J4.2 L1.2 R1.2 R11.2 R22.2 U1.1 U4.5 | length 78.3
  Int1 w1: U1.1 83.83,82.814 v2(88.265,87.249) 96.551,95.535 v2@97.186,95.535
  Int2 w1: v2@97.186,95.535 v2(97.282,95.631)
  Bottom Layer w0.254: L1.2 100.622,105.535 100.622,107.353 102.108,108.839
  Bottom Layer w0.65: R22.2 74.954,82.391 75.88,81.465 U4.5 76.116,80.988 81.699,80.988 83.474,79.213 83.474,78.392 C11.2 83.634,76.235 83.667,76.202 83.667,75.601 U1.1
  Bottom Layer w0.8: v2(88.265,87.249) 89.093,86.421 R11.2 ; 102.108,108.839 112.649,108.839 117.79,103.698 R1.2
  other v1: 97.282,97.536 100.33,97.536 102.997,97.536
"+22.2V BATTERY": C1.2 C3.2 C4.2 C5.2 C13.2 C14.2 C15.2 C22.2 C23.2 C24.2 J5.P J6.1 J7.P J8.1 R3.2 R6.1 R14.2 R25.2 U1.5 U2.7 U2.8 U3.2 U5.2 | length 74.2
  Int1 w2.5: v8@56.569,83.312 75.434,83.312 v8@78.736,86.614
  Int2 w1.5: v4(91.44,81.026) 100.914,90.5 v3(104.05,90.5)
  Int2 w2.5: v8(78.772,86.578) 78.772,84.296 82.042,81.026 v4(91.44,81.026)
  Bottom Layer w0.254: C24.2@58.404,88.848 C24.2 ; C22.2@58.42,85.022 C22.2 ; C13.2@81.407,84.904 81.407,86.673 C14.2 C15.2 81.391,88.698 R14.2 81.407,90.694 U3.2
  Bottom Layer w0.65: C24.2@58.404,88.848 R25.2 ; R25.2@58.42,90.694 U5.2 ; R6.1 102.245,90.525 104.025,90.525 v3(104.05,90.5)
  Bottom Layer w1: C14.2@81.407,86.673 81.407,88.646 R14.2@81.407,90.694
  other v1: 108.839,52.324 104.775,52.451 112.903,52.578 104.775,55.753 108.839,55.753 112.903,56.134 117.348,56.134 84.328,58.547 90.932,58.674 104.775,58.928 108.712,58.928 112.903,59.055 117.348,59.055 117.475,71.882 117.475,75.438 112.903,78.359 103.251,78.486 107.95,78.486 117.475,78.486 103.251,81.026 117.475,81.026 107.95,81.153
  other v4: 91.45,78.35
  other v7: 116.332,86.106 116.332,88.265
  other v8: 56.515,83.312
  other v9: 112.25,81.9
GND: C3.1 C4.1 C5.1 C6.1 C7.1 C8.1 C9.1 C10.1 C11.1 C13.1 C14.1 C15.1 C16.1 C18.1 C19.1 C20.1 C22.1 C23.1 C24.1 C25.1 C27.1 CS1.2 D1.2 D4.3 D5.2 D6.1 D7.2 J1.1 J1.2 J1.4 J1.6 J1.8 J1.10 J1.MP1 J1.MP2 J2.N J3.A1 J3.A12 J3.B1 J3.B12 J3.MH1 J3.MH2 J3.MH3 J3.MH4 J3.MH5 J3.MH6 J4.5 J4.6 J5.N J6.2 J7.N J8.2 R2.1 R4.1 R8.1 R10.1 R13.1 R15.1 R17.1 R18.1 R21.1 R24.1 R26.1 R27.1 U1.2 U2.2 U2.5 U2.9 U3.7 U3.9 U4.2 U5.7 U5.9 | length 71.7
  Top Layer w0.254: J5.N J5.N@98.589,63.507
  Int1 w1: U1.2 81.92,82.682 82.423,83.185 84.709,85.471 84.709,88.773 v1(86.106,90.17) v1(88.011,90.17)
  Int2 w1: J3.MH4 J3.MH4@73.255,87.289
  Bottom Layer w0.254: C25.1@58.404,100.247 C25.1 ; U3.9 U3.9@81.407,96.139 ; R15.1 R15.1@81.435,106.382 ; C11.1@81.92,78.178 C11.1 ; C9.1@93.785,95.944 C9.1
  Bottom Layer w0.65: C25.1@58.404,100.247 R24.1@58.404,108.585 ; 58.42,97.028 C25.1@58.42,100.175 ; R18.1 73.759,75.45 73.759,76.26 ; U4.2 74.93,77.431 73.759,76.26 ; R15.1 R13.1@81.391,108.585 ; U3.9@81.407,96.139 C16.1@81.407,100.175 ; C16.1 R15.1@81.435,106.382 ; C11.1@81.92,78.178 U1.2 80.076,73.594 76.589,73.594 76.193,73.198 71.992,73.198 70.717,74.473 70.717,74.505 70.184,75.038 69.909,75.038 69.784,75.163 69.784,75.713 69.909,75.838 70.336,75.838 70.717,76.219 70.717,76.403 71.056,76.742 73.276,76.742 73.759,76.26 ; C10.1 C9.1@93.785,95.944
  other v1: 72.009,63.119 75.946,63.119 80.137,63.119 84.201,63.119 88.011,63.119 91.567,63.119 58.928,66.421 72.009,66.802 75.946,66.802 80.137,66.802 84.201,66.802 88.011,66.802 91.567,66.802 54.356,70.231 58.928,70.358 68.199,70.358 63.373,70.485 72.009,70.485 75.946,70.485 80.137,70.485 84.201,70.485 88.011,70.485 91.567,70.485 103.251,71.628 57.404,73.533 60.96,73.533 64.262,73.533 68.199,73.533 91.567,74.295 103.251,74.803 60.96,76.581 64.262,76.581 57.404,76.708 57.404,79.883 60.96,79.883 64.262,79.883
  other v3: 64.262,83.312 61.6,83.35 63.754,85.852 63.754,88.9 108.458,91.059 116.205,92.71 105.918,92.837 85.598,95.504 73.279,95.631 89.154,95.631 63.627,95.758
  other v4: 52.959,76.708 52.959,80.01 66.45,87.1 66.5,89.85
  other v6: 73.787,89.916 75.692,95.631
NetC1_1: C1.1 D1.1 L1.1 U2.1 | length 30.5
  Int1 w1: v2(111.506,105.283) 115.189,105.283 118.745,101.727 118.745,85.044 117.497,83.796 116.296,83.796 v2(116.2,83.7)
  Bottom Layer w0.65: C1.1@114.239,83.7 114.265,83.726 116.174,83.726 v2(116.2,83.7)
  other v2: 107.569,99.949 110.617,99.949
NetC8_1: C2.1 R4.2 | length 1.4
  Bottom Layer w0.65: C2.1 R4.2
NetC8_2: C2.2 U2.3 | length 1.7
  Bottom Layer w0.65: U2.3 C2.2
NetC9_1: C21.1 U5.1 | length 17.5
  Int1 w0.65: v2@59.944,90.805 v2@59.944,103.759
  Int2 w0.65: v2(59.817,103.886) v2@59.944,103.759 ; v2@59.944,90.805 v2(60.071,90.678)
  Bottom Layer w0.254: 59.888,91.75 59.944,91.694
  Bottom Layer w0.65: U5.1 59.69,92.227 59.888,92.029 59.888,91.75 ; v2(59.817,103.886) 59.98,103.723 59.98,102.013 C21.1@60.071,101.922 ; 59.944,91.694 59.944,90.805 v2(60.071,90.678)
NetC9_2: C21.2 D7.1 L3.1 U5.8
NetC10_2: C19.2 C20.2 J1.3 J1.5 J1.7 J1.9 L3.2 R23.2 | length 4.1
  Bottom Layer w0.65: L3.2 R23.2@67.043,108.712
  other v4: 70.485,101.854 70.485,105.156
NetC12_1: C12.1 U3.1 | length 16.9
  Int1 w0.65: v2(82.9,103.4) 82.979,103.321 82.979,90.853 v2@82.931,90.805
  Int2 w0.254: v2@82.931,90.805 v2(83.058,90.678)
  Bottom Layer w0.254: v2(83.058,90.678) v2@83.058,90.953
  Bottom Layer w0.65: U3.1 82.677,91.334 v2@83.058,90.953 ; v2(82.9,103.4) 82.979,103.321 82.979,101.747 C12.1
NetC12_2: C12.2 D5.1 L2.1 U3.8
NetC13_2: C9.2 C10.2 J3.A4 J3.A9 J3.B4 J3.B9 L2.2 R12.2 | length 3.9
  Bottom Layer w0.65: L2.2 R12.2@90.03,108.585
  other v4: 92.9,99.95 92.9,102.9
  other v5: 73.787,89.916 75.692,95.631 75.692,99.187 75.692,102.362 75.692,105.41 75.692,108.077 92.329,108.077 94.361,108.077 77.851,108.585 85.725,108.585
NetC18_1: C26.1 R26.2 | length 1.7
  Bottom Layer w0.254: R26.2@56.388,106.41 R26.2
  Bottom Layer w0.65: C26.1 R26.2@56.388,106.41
NetC18_2: C25.2 C26.2 U5.6 | length 4.1
  Bottom Layer w0.254: C25.2 C25.2@56.868,100.418
  Bottom Layer w0.65: C26.2 56.628,101.751 56.713,101.666 56.713,100.573 C25.2@56.868,100.418 ; C25.2 56.868,98.809 57.15,98.527 U5.6
NetC23_1: C17.1 R15.2 | length 1.7
  Bottom Layer w0.254: R15.2@79.375,106.41 R15.2
  Bottom Layer w0.65: C17.1 R15.2@79.375,106.41
NetC23_2: C16.2 C17.2 U3.6 | length 3.8
  Bottom Layer w0.254: C16.2 C16.2@79.855,100.418
  Bottom Layer w0.65: C17.2 79.375,100.898 C16.2@79.855,100.418 ; C16.2 79.855,99.988 80.137,99.706 U3.6
NetC25_2: C27.2 U5.4 | length 1.6
  Bottom Layer w0.254: C27.2 C27.2@54.379,92.665
  Bottom Layer w0.65: C27.2@54.379,92.665 U5.4
NetC26_2: C18.2 U3.4 | length 1.6
  Bottom Layer w0.254: C18.2 C18.2@77.366,92.792
  Bottom Layer w0.65: C18.2@77.366,92.792 U3.4
NetCS1_1: CS1.1 D6.2 J2.P U1.4
  other v1: 57.023,52.07 60.198,52.07 57.15,54.61 60.325,54.737 75.819,58.42 79.502,58.42
NetD6_1: D2.1 J4.3 R5.2 | length 19
  Top Layer w0.6: J4.3 95.367,91.153 102.07,84.45 v1(105.8,84.45)
  Bottom Layer w0.65: D2.1@103.845,84.698 105.067,85.92 105.539,85.92 R5.2@105.664,86.045 ; v1(105.8,84.45) 105.8,86.125 R5.2@105.825,86.125
NetD6_2: D2.2 D3.2 D4.2 R9.2 R11.1 | length 11.8
  Bottom Layer w0.254: D2.2@101.897,84.521 D2.2
  Bottom Layer w0.56: R11.1 D4.2
  Bottom Layer w0.65: D4.2 R9.2 D3.2 D2.2@101.897,84.521
NetD7_1: D3.1 J4.4 R7.2 | length 30.9
  Top Layer w0.6: J4.4 94.117,89.017 99.988,83.146 106.41,83.146 107.123,83.86 107.123,84.971 105.495,86.599 104.051,86.599 v1(102.2,88.45)
  Bottom Layer w0.254: D3.1 D3.1@100.391,86.525
  Bottom Layer w0.65: D3.1@100.391,86.525 R7.2 100.42,88.421 102.171,88.421 v1(102.2,88.45)
NetD8_1: D4.1 R9.1 R10.2 | length 3.8
  Bottom Layer w0.254: R10.2@96.266,88.331 R10.2
  Bottom Layer w0.65: D4.1 R9.1 R10.2@96.266,88.331
NetR1_1: R3.1 U2.6 | length 1.9
  Bottom Layer w0.65: R3.1@113.919,88.707 U2.6
NetR2_1: R1.1 R2.2 U2.4 | length 5
  Bottom Layer w0.254: U2.4 U2.4@115.189,96.424
  Bottom Layer w0.65: U2.4@115.189,96.424 115.89,97.125 R1.1 ; R1.1@115.951,98.74 R2.2
NetR5_1: R25.1 R27.2 U5.3 | length 3.9
  Bottom Layer w0.254: R25.1 56.404,90.928 56.752,91.276 56.905,91.276
  Bottom Layer w0.65: R27.2@54.848,90.678 R25.1 ; 56.905,91.276 57.15,91.521 U5.3
NetR6_1: R14.1 R17.2 U3.3 | length 4.5
  Bottom Layer w0.254: R14.1 R14.1@79.391,90.928 ; 79.932,91.469 79.957,91.469
  Bottom Layer w0.65: R17.2 R14.1 ; R14.1@79.391,90.928 79.932,91.469 ; 79.957,91.469 80.137,91.648 U3.3
NetR7_1: R23.1 R24.2 U5.5 | length 23.5
  Int2 w0.65: v6(54.864,108.712) v6(62.738,108.712)
  Bottom Layer w0.65: v6(54.864,108.712) 54.864,99.543 55.88,98.527 U5.5 ; R24.2 v6(62.738,108.712) R23.1
NetR8_1: R12.1 R13.2 U3.5 | length 23.3
  Int2 w0.65: v6(77.851,108.585) v6(85.725,108.585)
  Bottom Layer w0.65: v6(77.851,108.585) 77.851,99.67 78.867,98.654 U3.5 ; R13.2 v6(85.725,108.585) R12.1
NetR15_1: R16.1 R18.2 U4.1 | length 8.5
  Bottom Layer w0.65: R18.2 71.921,75.288 71.921,74.651 72.47,74.102 75.304,74.102 75.685,74.483 75.685,75.288 R16.1 ; R16.1@75.88,75.483 U4.1@75.88,77.952
NetR15_2: R16.2 U1.3 | length 2.2
  Bottom Layer w0.65: R16.2 U1.3
NetR17_1: R20.1 R21.2 R22.1 | length 5
  Bottom Layer w0.254: R20.1@67.884,78.409 R20.1 ; R22.1 R22.1@67.961,80.375
  Bottom Layer w0.65: R21.2 R20.1@67.884,78.409 ; R20.1 R22.1@67.961,80.375
NetR17_2: R19.2 R20.2 U4.3 | length 4
  Bottom Layer w0.65: R20.2@69.961,78.502 R19.2 U4.3@73.955,78.502
PIXHAWK_CURRENT_READ: R5.1 R19.1 U4.4 | length 55.5
  Int1 w0.65: v2(69.977,80.518) 77.343,73.152 84.328,73.152 85.852,74.676 85.852,81.026 91.694,86.868 102.997,86.868 105.85,89.721 v2@105.85,89.85
  Bottom Layer w0.254: R19.1@71.993,80.518 R19.1
  Bottom Layer w0.65: v2(69.977,80.518) R19.1@71.993,80.518 ; R19.1 72.159,80.652 72.69,80.652 72.79,80.752 U4.4 ; R5.1@105.793,88.15 105.793,89.812 v2(105.886,89.905)
PIXHAWK_VOLTAGE_READ: R6.2 R7.1 R8.2 | length 3.9
  Bottom Layer w0.254: R8.2 R8.2@98.491,90.546
  Bottom Layer w0.65: R8.2 R6.2 ; R7.1 R8.2@98.491,90.546
pads on no net: D2.3 D3.3 J3.A6 J3.A7 J3.B6 J3.B7 J4.MP1 J4.MP2

## Polygon pours and split planes (outlines as drawn)
GND on Bottom Layer "GND_L04_P025" (solid, pour order 25): 106.934,91.567 95.758,91.567 95.758,94.234 112.268,94.234 112.268,103.124 116.713,103.124 116.713,102.235 113.03,102.235 113.03,94.234 117.475,94.234 117.475,89.789 114.808,89.789 114.808,92.456 109.982,92.456 109.982,83.566 106.934,83.566
"+22.2V BATTERY" on Bottom Layer "+22.2V_BATTERY_L04_P019" (solid, pour order 19): 120,54.483 115.189,54.483 115.189,50 82.296,50 82.296,60.198 111.379,60.198 111.379,77.089 89.916,77.089 89.916,82.55 120,82.55
NetCS1_1 on Bottom Layer "NETCS1_1_L04_P018" (solid, pour order 18): 81.534,50 55.245,50 55.245,55.372 51.435,55.372 51.435,60.198 81.534,60.198
GND on Bottom Layer "GND_L04_P017" (solid, pour order 17): 59.65,81.661 51.435,81.661 51.435,69.596 51.562,69.469 66.294,69.469 66.294,83.82 59.65,83.82
GND on Bottom Layer "GND_L04_P008" (solid, pour order 8): 91.567,87.63 91.567,88.265 86.614,88.265 86.614,83.82 82.55,83.82 82.55,89.662 84.074,89.662 84.074,93.98 76.581,93.98 76.581,83.82 73.66,83.82 73.66,97.028 76.2,97.028 76.2,96.52 95.758,96.52 95.758,87.503 92.837,87.503 92.71,87.63
GND on Bottom Layer "GND_L04_P026" (solid, pour order 26): 97.155,89.662 97.155,91.44 91.567,91.44 91.567,85.09 92.837,85.09 92.837,87.503 94.996,87.503 94.996,89.662
"+22.2V BATTERY" on Bottom Layer "+22.2V_BATTERY_L04_P024" (solid, pour order 24): 117.348,87.376 117.348,84.836 113.157,84.836 113.157,82.55 110.363,82.55 110.363,91.44 113.157,91.44 113.157,87.376
NetC1_1 on Bottom Layer "NETC1_1_L04_P023" (solid, pour order 23): 112.776,107.061 112.776,103.632 111.887,103.632 111.887,95.123 110.871,95.123 110.871,97.028 106.299,97.028 106.299,107.061
"+5V PIXHAWK" on Bottom Layer "+5V_PIXHAWK_L04_P022" (solid, pour order 22): 96.266,94.615 96.266,109.728 104.14,109.728 104.267,109.855 104.267,94.615
GND on Bottom Layer "GND_L04_P020" (solid, pour order 20): 110.236,76.327 89.535,76.327 89.535,72.136 51.435,72.136 51.435,61.214 110.109,61.214 110.236,61.341
NetC10_2 on Bottom Layer "NETC10_2_L04_P006" (solid, pour order 6): 65.405,106.68 65.405,102.362 67.691,102.362 67.691,97.282 72.009,97.282 72.136,97.409 73.025,97.409 73.025,106.68
NetC13_2 on Bottom Layer "NETC13_2_L04_P013" (solid, pour order 13): 88.265,106.68 88.265,102.362 90.551,102.362 90.551,97.028 95.758,97.028 95.758,106.68
GND on Bottom Layer "GND_L04_P010" (solid, pour order 10): 89.789,97.028 76.2,97.028 76.2,96.452 89.789,96.452
"+22.2V BATTERY" on Bottom Layer "+22.2V_BATTERY_L04_P007" (solid, pour order 7): 59.182,82.169 54.356,82.169 54.356,89.535 59.182,89.535
"+22.2V BATTERY" on Bottom Layer "+22.2V_BATTERY_L04_P014" (solid, pour order 14): 82.296,83.82 77.216,83.82 77.216,89.535 82.296,89.535
NetC12_2 on Bottom Layer "NETC12_2_L04_P011" (solid, pour order 11): 82.169,97.536 82.169,100.711 84.074,100.711 84.074,106.68 86.741,106.68 86.741,101.854 89.789,101.854 89.789,97.536
NetC9_2 on Bottom Layer "NETC9_2_L04_P004" (solid, pour order 4): 59.309,97.536 59.309,100.711 61.214,100.711 61.214,106.68 63.881,106.68 63.881,101.854 66.929,101.854 66.929,97.536
GND on Bottom Layer "GND_L04_P002" (solid, pour order 2): 67.972,97.028 53.34,97.028 53.34,96.452 67.972,96.452
GND on Bottom Layer "GND_L04_P000" (solid, pour order 0): 53.34,83.82 50.165,83.82 50.165,105.029 53.34,105.029 53.34,96.52 57.658,96.52 59.182,96.52 67.31,96.52 67.818,97.028 73.66,97.028 73.66,83.82 59.65,83.82 59.65,89.662 61.214,89.662 61.214,93.98 53.34,93.98
NetC13_2 on Top Layer "NETC13_2_L01_P029" (solid, pour order 29): 95.758,109.474 95.758,97.028 90.551,97.028 90.551,104.521 77.089,104.521 77.089,88.392 69.596,88.392 69.596,88.75 72.39,88.75 72.39,90.75 69.596,90.75 69.596,91.186 74.295,91.186 74.295,109.474
GND on Top Layer "GND_L01_P028" (solid, pour order 28): 64.95,85.4 67.95,85.4 68,85.45 67.95,85.5 67.95,86.614 73.914,86.614 73.914,88.138 68.834,88.138 68.834,91.44 73.914,91.44 73.914,92.964 64.95,92.964
NetCS1_1 on Top Layer "NETCS1_1_L01_P044" (solid, pour order 44): 81.534,50.038 55.245,50.038 55.245,55.41 51.435,55.41 51.435,60.236 81.534,60.236
"+22.2V BATTERY" on Top Layer "+22.2V_BATTERY_L01_P035" (solid, pour order 35): 110.363,91.44 114.3,91.44 114.3,89.281 117.348,89.281 117.348,84.836 114.3,84.836 114.3,82.55 120.015,82.55 120.015,54.483 115.189,54.483 115.189,50.038 82.296,50.038 82.296,60.198 111.379,60.198 111.379,60.325 111.379,77.089 89.916,77.089 89.916,82.15 110.363,82.15
GND on Top Layer "GND_L01_P049" (solid, pour order 49): 51.435,61.214 51.435,81.661 66.294,81.661 66.294,78.994 73.152,72.136 89.535,72.136 89.535,76.327 110.236,76.327 110.236,61.214
NetC10_2 on Top Layer "NETC10_2_L01_P034" (solid, pour order 34): 61.214,91.821 58.928,91.821 58.928,88.392 55.499,88.392 55.499,89.154 57.658,89.154 57.658,90.932 55.499,90.932 55.499,91.567 57.658,91.567 57.658,93.472 57.531,93.345 55.499,93.345 55.499,94.107 57.658,94.107 57.658,95.885 57.785,96.012 55.499,96.012 55.499,96.647 57.658,96.647 57.658,102.489 67.691,102.489 67.691,106.68 73.025,106.68 73.025,97.282 72.898,97.155 61.214,97.155
GND on Top Layer "GND_L01_P033" (solid, pour order 33): 57.15,100.203 57.15,97.282 54.483,97.282 54.483,95.377 57.277,95.377 57.277,94.742 54.483,94.742 54.483,92.837 57.277,92.837 57.277,92.202 54.483,92.202 54.483,90.297 57.277,90.297 57.277,89.662 54.483,89.662 54.483,87.884 57.277,87.884 57.277,85.979 54.483,85.979 54.483,75.692 51.435,75.692 51.435,100.203
GND on Top Layer "GND_L01_P032" (solid, pour order 32): 88.9,89.281 85.217,89.281 85.217,94.234 93.472,94.234 93.472,91.821 88.9,91.821
"+5V PIXHAWK" on Top Layer "+5V_PIXHAWK_L01_P031" (solid, pour order 31): 96.266,91.567 96.266,98.933 104.267,98.933 104.267,91.567
NetCS1_1 on Int1 "NETCS1_1_L02_P045" (solid, pour order 45): 81.534,50 55.245,50 55.245,55.372 51.435,55.372 51.435,60.198 81.534,60.198
"+22.2V BATTERY" on Int1 "+22.2V_BATTERY_L02_P036" (solid, pour order 36): 110.363,91.44 114.3,91.44 114.3,89.281 117.348,89.281 117.348,84.836 114.3,84.836 114.3,82.55 120.015,82.55 120.015,54.483 115.189,54.483 115.189,50.038 82.296,50.038 82.296,60.198 111.379,60.198 111.379,60.325 111.379,77.089 89.916,77.089 89.916,82.55 110.363,82.55
NetC1_1 on Int1 "NETC1_1_L02_P052" (solid, pour order 52): 112.776,107.061 112.776,103.632 111.887,103.632 111.887,97.028 106.299,97.028 106.299,107.061
GND on Int1 "GND_L02_P047" (solid, pour order 47): 66.294,78.994 73.152,72.136 89.535,72.136 89.535,76.327 110.236,76.327 110.236,61.214 51.435,61.214 51.435,81.661 51.562,81.534 66.294,81.534
"+22.2V BATTERY" on Int1 "+22.2V_BATTERY_L02_P041" (solid, pour order 41): 59.182,92.837 54.483,92.837 54.356,92.71 54.356,82.169 59.182,82.169
"+22.2V BATTERY" on Int1 "+22.2V_BATTERY_L02_P039" (solid, pour order 39): 77.47,83.82 77.47,92.329 81.915,92.329 81.915,83.82
NetC13_2 on Int1 "NETC13_2_L02_P030" (solid, pour order 30): 95.758,109.474 95.758,97.155 90.678,97.155 90.551,97.028 90.551,104.521 77.343,104.521 77.089,104.394 77.089,88.392 69.215,88.392 69.215,91.186 74.295,91.186 74.295,109.474